# Altium PCB ESP_Grow_Main_Rev_B.PcbDoc (part 1 of 2)
Units mm, origin at the board's own origin, x right, y up, seen from the top; angles counter-clockwise.
Board outline 80 x 80 mm, 4 copper layers (Top Copper, GND, Power, Bottom Copper), stack 1.57 mm thick; 66 components, 30 nets, 190 pads, 293 vias.
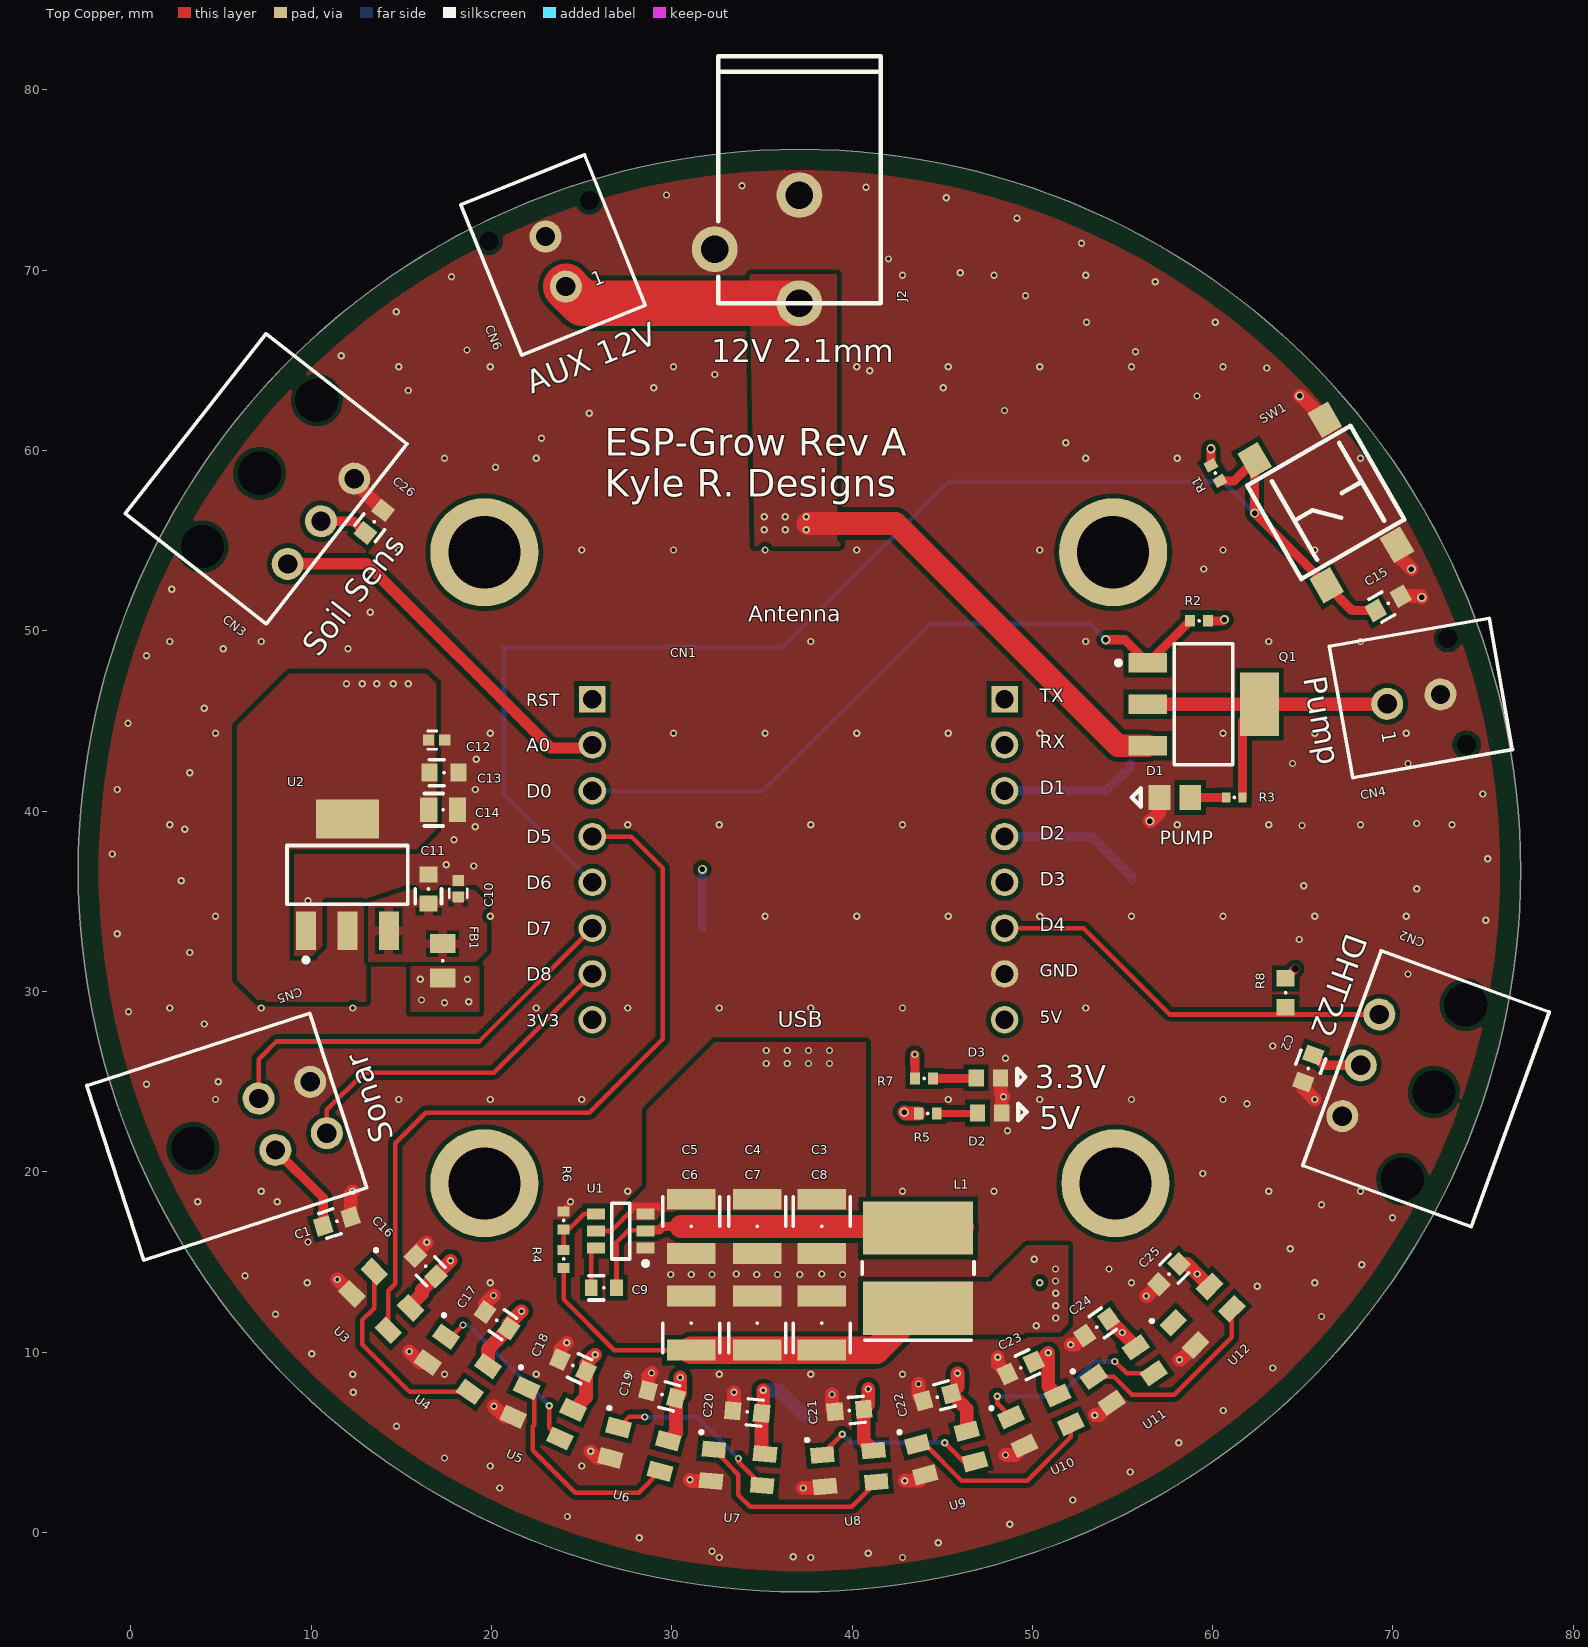
[diagram p0: Top Copper view]
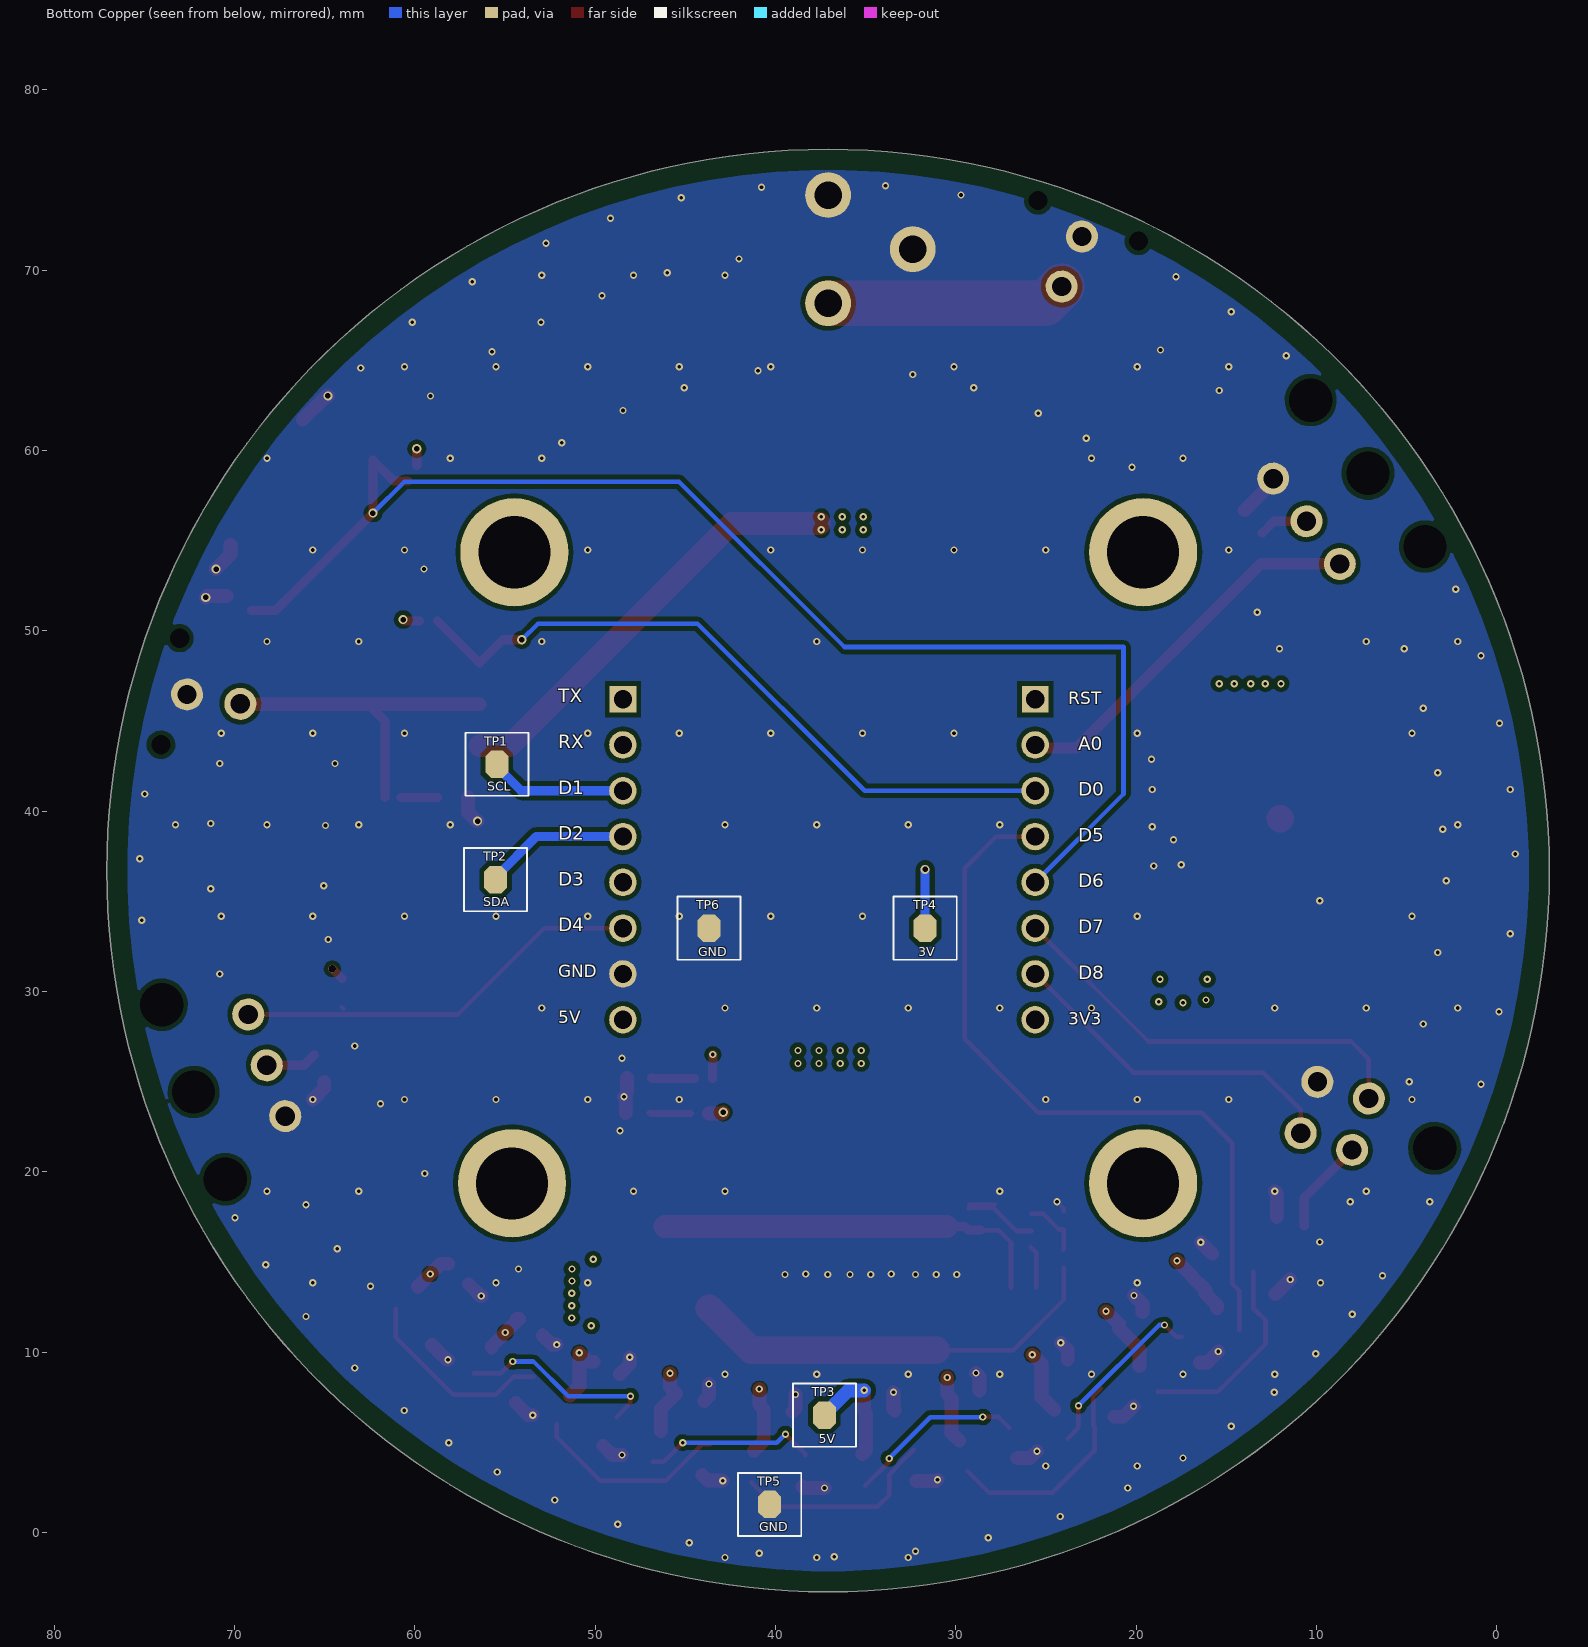
[diagram p1: Bottom Copper view, seen from below]
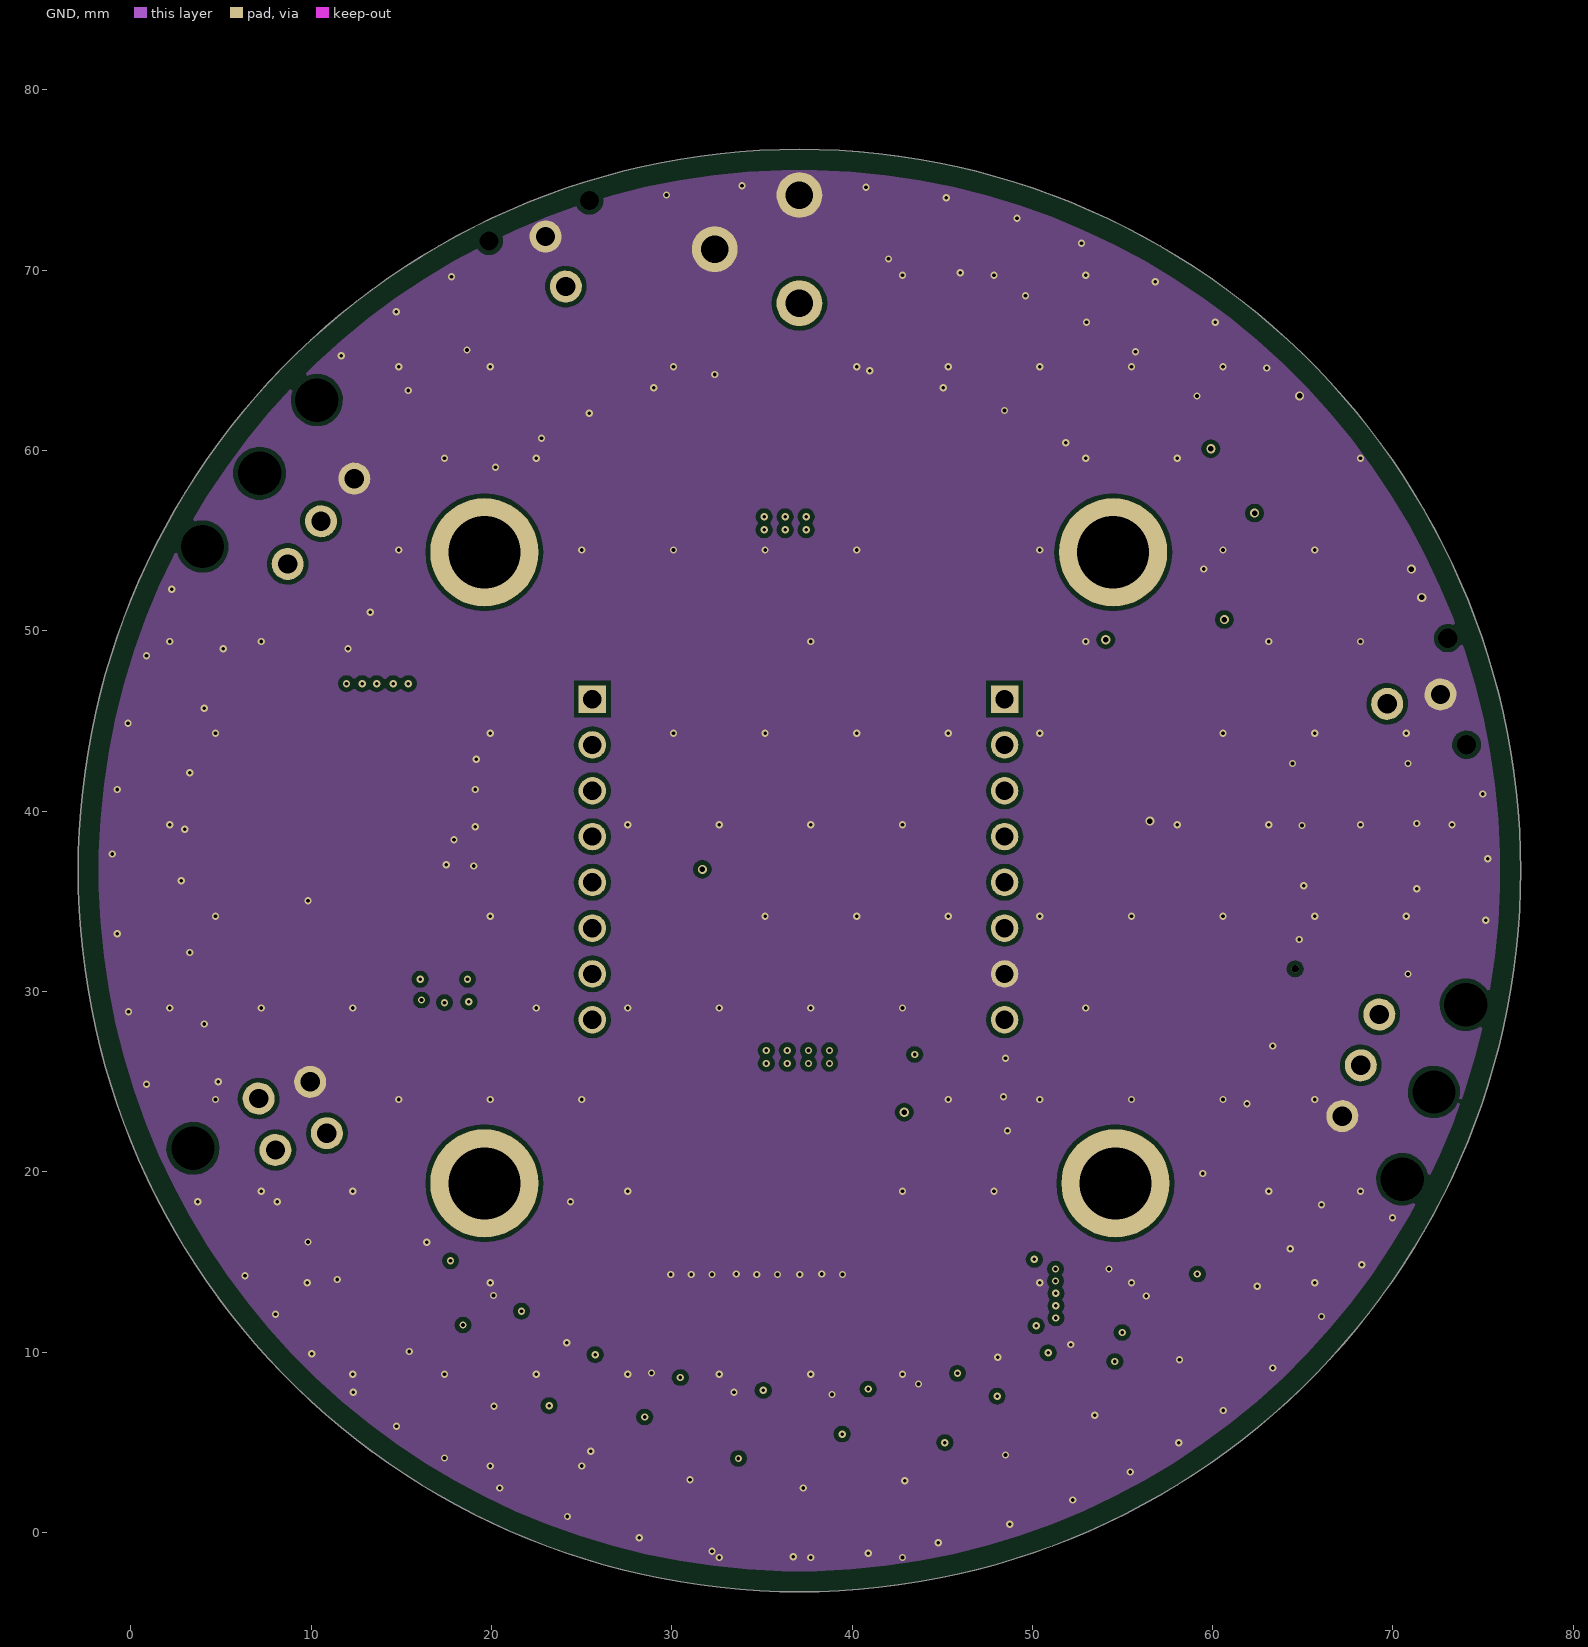
[diagram p2: GND]
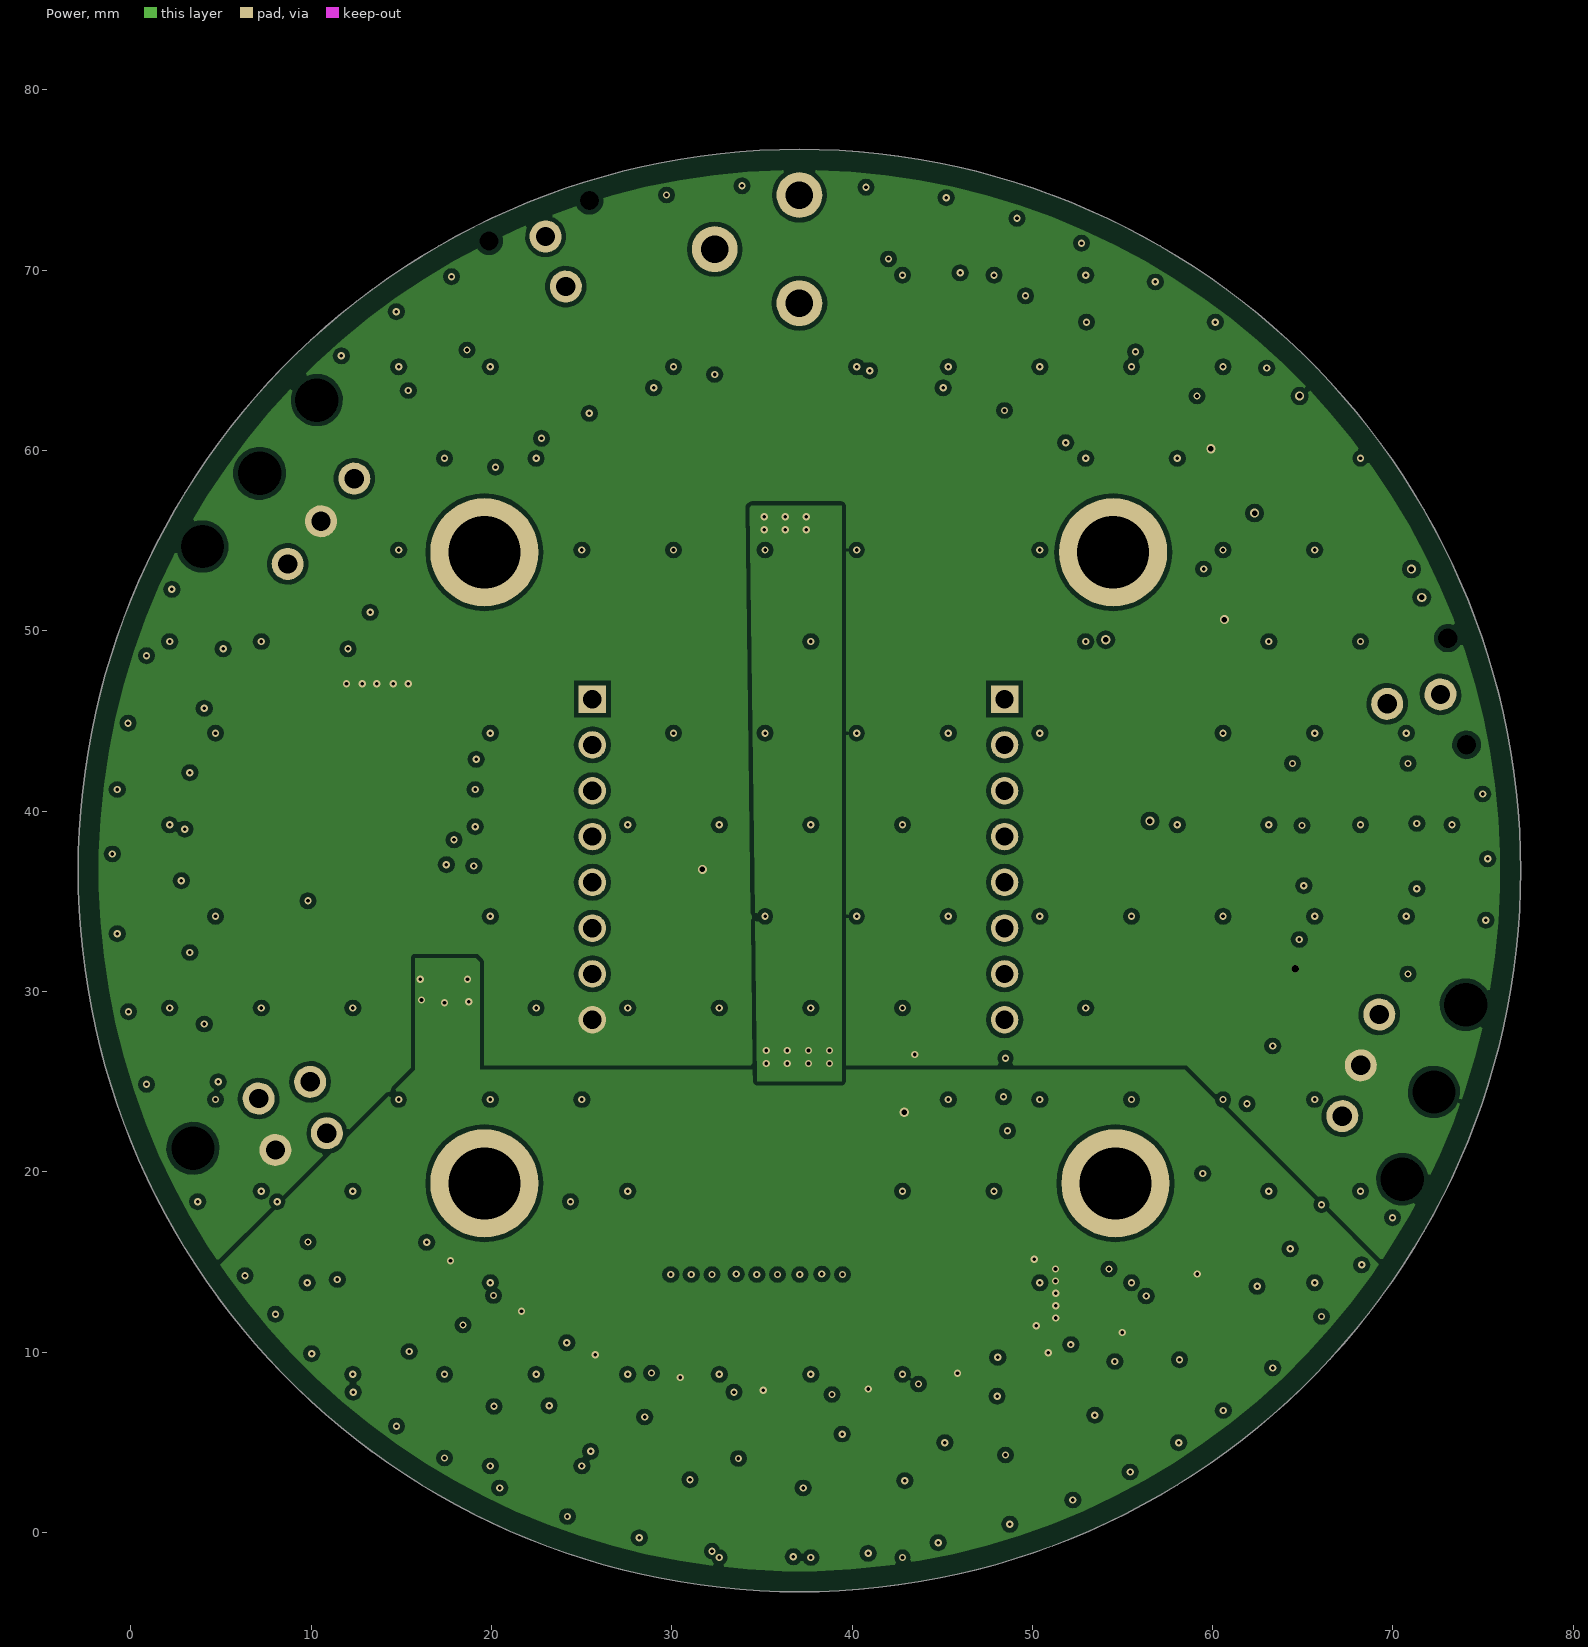
[diagram p3: Power]
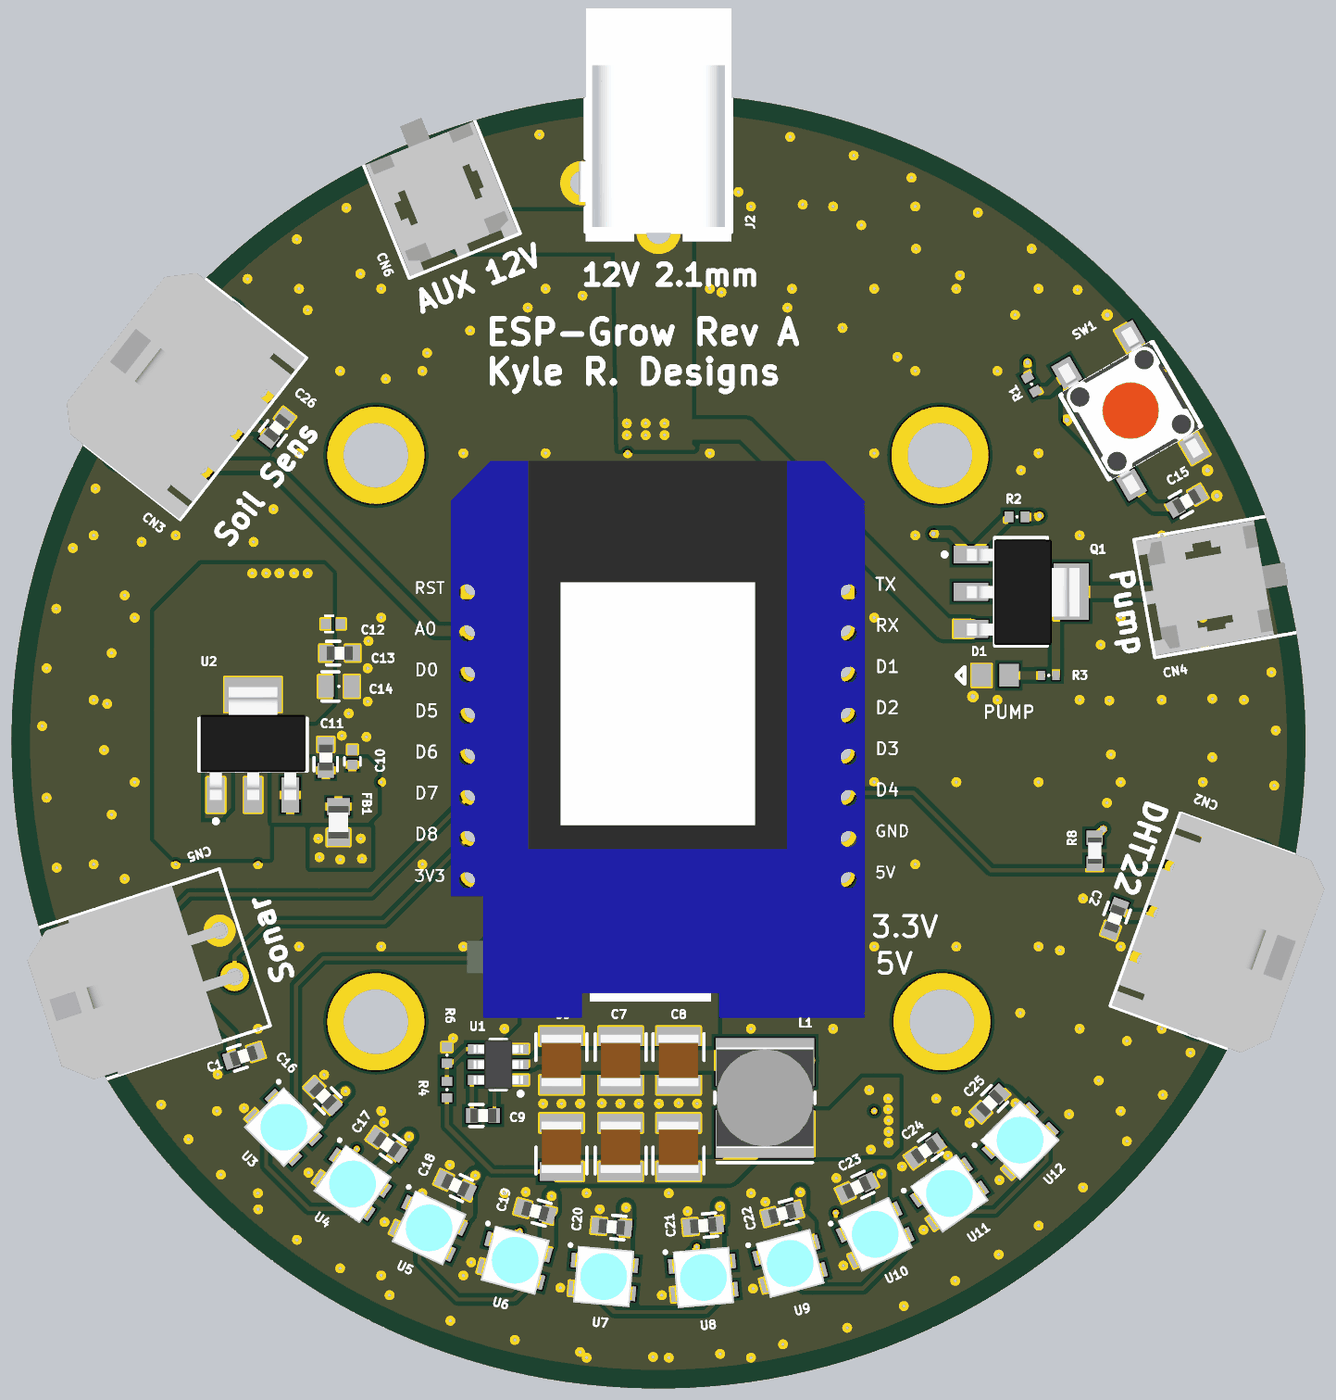
[diagram p4: 3D render of the assembled board from above, using the file's embedded part models]

## Layer stack, top to bottom
Top Mask: solder mask 0.015, Solder Resist, Dk 3.8
Top Copper: signal copper 0.035
Dielectric 1: prepreg 0.1, 2313, Dk 4.05
GND: signal copper 0.0175
Core: core 1.265, FR-4, Dk 4.5
Power: signal copper 0.0175
Dielectric 2: prepreg 0.1, 2313, Dk 4.05
Bottom Copper: signal copper 0.035
Bottom Mask: solder mask 0.015, Solder Resist, Dk 3.8

## Board outline
-2.916,36.703 ccw(c37.084,36.703) 37.084,-3.297 ccw(c37.084,36.703) 77.084,36.703 ccw(c37.084,36.703) 37.084,76.703 ccw(c37.084,36.703)

## Design rules (kind name [scope] priority, off if disabled: settings)
BoardOutlineClearance [All] p1: gap=0.254 ignorepadtopadclearanceinfootprint=FALSE except(0: Arc-SplitContinuation Track-OutlineEdge Track-SplitContinuation SMDPad-SplitContinuation THPad-SplitContinuation Via-SplitContinuation Fill-SplitContinuation Poly-SplitContinuation Region-SplitContinuation Text-SplitContinuation; 1.143: Poly-OutlineEdge)
Clearance [All] p1: gap=0.254 ignorepadtopadclearanceinfootprint=TRUE except(0: Arc-Hole Track-Hole SMDPad-Hole THPad-Hole Via-Hole Fill-Hole Poly-Hole Region-Hole Text-Hole; 0.051: SMDPad-SMDPad)
HoleSize [All] p1: absolutevalues=TRUE maxlimit=6.35 minlimit=0.025 maxpercent=80.000 minpercent=20.000
MinimumSolderMaskSliver [All] p1: minsoldermaskwidth=0
PlaneConnect NetC6_1 [InNet('NetC6_1')] p1: planeconnectstyle=Direct reliefexpansion=0.508 reliefentries=4 reliefconductorwidth=0.254 reliefairgap=0.254
PlaneConnect [All] p2: planeconnectstyle=Direct reliefexpansion=0.508 reliefentries=4 reliefconductorwidth=0.254 reliefairgap=0.254
PolygonConnect PolygonConnect_1 [InNet('5V') Or InNet('3.3V') Or InNet('GND') Or InNet('12V')] p1: connectstyle=Direct reliefconductorwidth=0.254 reliefentries=4 polygonreliefangle="90 Angle" airgapwidth=0.254
PolygonConnect PolygonConnect_2 [InNet('NetC6_1')] p2: connectstyle=Direct reliefconductorwidth=0.254 reliefentries=4 polygonreliefangle="90 Angle" airgapwidth=0.254
PolygonConnect [All] p3: connectstyle=Relief reliefconductorwidth=0.508 reliefentries=4 polygonreliefangle="90 Angle" airgapwidth=0.203
RoutingVias [All] p1: holewidth=0.305 width=0.508 viastyle="Through Hole" minholewidth=0.152 minwidth=0.254 maxholewidth=0.711 maxwidth=1.27
SilkToSilkClearance [All] p1: silktosilkclearance=0.051
SilkToSolderMaskClearance [IsPad] p1: minsilkscreentomaskgap=0.025 clearancetoexposedcopper=TRUE
SolderMaskExpansion [All] p1: expansion=0.102
Width [All] p1: maxlimit=7.62 minlimit=0.152 preferedwidth=0.254
25 further rules are at their usual default settings.

## Components (designator, comment, footprint, x,y, rotation, side; value= is the part's Value field where it differs from the comment)
C1 "1uF" CAPC0603(1608)_N 11.436,17.247 r18 top
C2 "1uF" CAPC0603(1608)_N 65.3,25.725 r250 top
C3 "10uF" CAPC1210(3225)_N 38.323,16.967 r270 top
C4 "10uF" CAPC1210(3225)_N 34.742,16.967 r270 top
C5 "10uF" CAPC1210(3225)_N 31.084,16.967 r270 top
C6 "10uF" CAPC1210(3225)_N 31.084,11.608 r90 top
C7 "10uF" CAPC1210(3225)_N 34.742,11.608 r90 top
C8 "10uF" CAPC1210(3225)_N 38.323,11.608 r90 top
C9 "0.1uF" CAPC0603(1608)_L 26.238,13.564 r0 top
C10 "0.1uF" CAPC0402(1005)_N 18.161,35.694 r90 top
C11 "1uF" CAPC0603(1608)_N 16.51,35.683 r90 top
C12 "0.1uF" CAPC0402(1005)_N 16.967,43.938 r0 top
C13 "1uF" CAPC0603(1608)_N 17.374,42.134 r0 top
C14 "10uF" CAPC0805(2012)_L 17.323,40.077 r0 top
C15 "1uF" CAPC0603(1608)_N 69.741,51.526 r30 top
C16 "1uF" CAPC0603(1608)_N 16.351,14.764 r135 top
C17 "1uF" CAPC0603(1608)_N 20.3,11.762 r145 top
C18 "1uF" CAPC0603(1608)_N 24.523,9.253 r155 top
C19 "1uF" CAPC0603(1608)_N 29.464,7.645 r165 top
C20 "1uF" CAPC0603(1608)_N 34.188,6.68 r175 top
C21 "1uF" CAPC0603(1608)_N 39.853,6.756 r185 top
C22 "1uF" CAPC0603(1608)_N 44.729,7.493 r195 top
C23 "1uF" CAPC0603(1608)_N 49.352,9.119 r205 top
C24 "1uF" CAPC0603(1608)_N 53.569,11.379 r215 top
C25 "1uF" CAPC0603(1608)_N 57.582,14.326 r225 top
C26 "1uF" CAPC0603(1608)_N 13.5,56.05 r52 top
CN1 "J/Wemo_ESP_Shield" WEMOS_D1 24.238,19.606 r0 top locked
CN2 "DHT22" "Molex 1x3 Microfit 90deg" 68.216,25.903 r160 top
CN3 "Soil Sens" "Molex 1x3 Microfit 90deg" 10.55,56.075 r322 top
CN4 "Pump" "Molex 1x2 Microfit 3.0" 69.683,45.95 r280 top
CN5 "Sonar" "Molex 2x2 Microfit 90deg" 4.581,17.819 r18 top
CN6 "AUX 12V" "Molex 1x2 Microfit 3.0" 24.13,69.088 r22 top
D1 "D/LEDR/0805" D/0805 57.905,40.756 r0 top
D2 "D/LEDB/0603" D/0603 47.63,23.263 r180 top
D3 "D/LEDB/0603" D/0603 47.557,25.207 r180 top
FB1 "600 Ohm @ 100MHz" RESC0805(2012)_N 17.297,31.699 r90 top
J2 "12V 2.1mm" CONN_PWR_JACK_2.1x5.5mm 37.084,68.168 r0 top
L1 "4.7uH" INDP6060X45N 43.663,14.656 r90 top
Q1 "DMP6023LE-13" "SOT-223 - DMP6023LE" 59.5,45.925 r270 top
R1 "10K" RESC0402(1005)_N 60.15,58.75 r120 top
R2 "10K" RESC0402(1005)_N 59.25,50.55 r0 top
R3 "1K" RESC0402(1005)_L 61.207,40.756 r0 top
R4 "56.2K 1%" RESC0402(1005)_N 24.003,15.164 r270 top
R5 "470" RESC0402(1005)_N 44.201,23.232 r180 top
R6 "10K" RESC0402(1005)_N 24.003,17.297 r270 top
R7 "100" RESC0402(1005)_N 44.001,25.173 r180 top
R8 "4.7K" RESC0603(1608)_N 64.05,29.925 r90 top
SW1 "SPST-NO 12V" "SW TACT Red 6mm x 6mm" 66.275,57.116 r120 top
TP1 "SCL" Pogo-Testpoint 55.45,42.6 r180 bottom
TP2 "SDA" Pogo-Testpoint 55.525,36.2 r180 bottom
TP3 "5V" Pogo-Testpoint 37.287,6.502 r180 bottom
TP4 "3V" Pogo-Testpoint 31.7,33.51 r180 bottom
TP5 "GND" Pogo-Testpoint 40.325,1.55 r180 bottom
TP6 "GND" Pogo-Testpoint 43.688,33.51 r180 bottom
U1 "U/TPS562209DDCR" SOT-23 27.178,16.713 r180 top
U2 "3.3V" DSO-G3 12.014,36.47 r0 top
U3 "SK6812 MINI" SK6812_MINI 13.504,14.461 r315 top
U4 "SK6812 MINI" SK6812_MINI 17.477,10.855 r325 top
U5 "SK6812 MINI" SK6812_MINI 21.953,7.997 r335 top
U6 "SK6812 MINI" SK6812_MINI 27.051,5.817 r345 top
U7 "SK6812 MINI" SK6812_MINI 32.334,4.588 r355 top
U8 "SK6812 MINI" SK6812_MINI 38.354,4.283 r5 top
U9 "SK6812 MINI" SK6812_MINI 43.612,4.877 r15 top
U10 "SK6812 MINI" SK6812_MINI 48.816,6.387 r25 top
U11 "SK6812 MINI" SK6812_MINI 53.403,8.622 r35 top
U12 "SK6812 MINI" SK6812_MINI 57.818,11.626 r45 top

## Footprints (in the part's own frame and the unit in brackets; to place one, negate y for a bottom-side part, rotate by r counter-clockwise, add the part's x,y. Pads: shape width x height; smd on the part's side, far side on the other; paste and mask are expansions set on the pad)
CAPC0402(1005)_N [mm] "Chip Capacitor, Body 1.0x0.5mm, Height 0.7mm, IPC Medium Density"
  rect 0.62x0.62 smd: 1(-0.45,0) 2(0.45,0)
  silkscreen extent -0.5,-0.5 0,0.5, body extent -0.55,-0.3 0.55,0.3, height 0.7
CAPC0603(1608)_L [mm] "Chip Capacitor, Body 1.6x0.8mm, Height 1.0mm, IPC High Density"
  rect 0.7x0.9 smd: 1(-0.7,0) 2(0.7,0)
  silkscreen extent -0.82,-0.68 0.05,0.68, body extent -0.8,-0.44 0.8,0.43, height 0.86
CAPC0603(1608)_N [mm] "Chip Capacitor, Body 1.6x0.8mm, Height 1.0mm, IPC Medium Density"
  rect 0.9x1 smd: 1(-0.8,0) 2(0.8,0)
  silkscreen extent -0.82,-0.73 0.05,0.73, body extent -0.8,-0.44 0.8,0.43, height 0.86
CAPC0805(2012)_L [mm] "Chip Capacitor, Body 2.0x1.2mm, Height 1.55mm, IPC High Density"
  rect 0.95x1.35 smd: 1(-0.8,0) 2(0.8,0)
  silkscreen extent -1.05,-0.9 0.05,0.9, body extent -1.1,-0.72 1.1,0.72, height 1.55
CAPC1210(3225)_N [mm] "Chip Capacitor, Body 3.2x2.5mm, Height 6.3mm, IPC Medium Density"
  rect 1.15x2.7 smd: 1(-1.5,0) 2(1.5,0)
  silkscreen extent -1.65,-1.58 0.05,1.57, body extent -1.6,-1.25 1.6,1.25, height 2.5
CONN_PWR_JACK_2.1x5.5mm [mm] "Power Connector, 2.1mm ID, 5.5mm OD"
  round 2.54 hole 1.524: 1(0,0) 2(0,6) 3(-4.7,3)
  silkscreen extent -4.5,0 4.5,13.7, body extent -4.9,-0.61 4.5,13.79, height 11
D/0603 [mm] "LED, 2-Leads, Body 1.60x0.80mm, IPC Medium Density"
  rect 0.85x0.95 smd: 1(-0.675,0) 2(0.675,0)
  silkscreen extent -2.05,-0.5 -1.6,0.4, body extent -0.85,-0.45 0.85,0.45, height 0.9
D/0805 [mm] "LED, 2-Leads, Body 2.00x1.25mm, IPC Medium Density"
  rect 1.2x1.4 smd: 1(-0.85,0) 2(0.85,0)
  silkscreen extent -2.4,-0.5 -1.9,0.5, body extent -1.05,-0.67 1.05,0.67, height 1.35
DSO-G3 [mm] "SOT-223/SC-73; 4 Leads; Body 6.7 x 7.3 mm, inc. leads (LxW max)"
  rect 1.1x2.15 smd: 1(-2.3,-3.1) 2(0,-3.1) 3(2.3,-3.1)
  rect 3.5x2.15 smd: 4(0,3.1)
  silkscreen extent -3.35,-4.85 3.35,1.63, body extent -3.25,-3.4 3.25,3.56, height 1.68
INDP6060X45N [mm] "Precision Wire Wound Inductor, 2-Leads, Body 6.00x6.00mm, IPC Medium Density"
  rect 2.95x6.1 smd: 1(-2.225,0) 2(2.225,0)
  silkscreen extent -4,-3.1 0.35,3.1, body extent -3.1,-3 3.1,3, height 4.6
"Molex 1x2 Microfit 3.0" [mil] "Connector; Header; 1x2 Position"
  round 0 hole 42 unplated: 0(-118.11,155.11) 0(118.11,155.11)
  round 70 hole 42: 1(0,0) 2(0,118.11)
  silkscreen extent -146,-102 146,252, body extent -141,-98 141,248, height 390
"Molex 1x3 Microfit 90deg" [mil] "Molex Microfit 1x3 90deg"
  round 0 hole 94.5 unplated: 0(-170.08,202.76) 0(-170.08,-202.76) 0(-170.08,0)
  round 70 hole 42: 1(0,-118.11) 2(0,0) 3(0,118.11)
  silkscreen extent -347,-250 44,249, body extent -349,-251 41,247, height 222
"Molex 2x2 Microfit 90deg" [mil] "Microfit 90 deg 2x2 Position"
  round 0 hole 94.88 unplated: 0(0,144.09)
  round 70 hole 42: 1(170.08,85.04) 2(170.08,203.15) 3(288.19,85.04) 4(288.19,203.15)
  silkscreen extent -178,-55 334,346, body extent -179,-56 303,344, height 348
Pogo-Testpoint [mil] "Test Point - Top Pad Only"
  oct 50x60 smd paste-60: 1(0,0)
  silkscreen extent -69,-69 69,69
RESC0402(1005)_L [mm] "Chip Resistor, Body 1.0x0.5mm, IPC High Density"
  rect 0.45x0.55 smd: 1(-0.45,0) 2(0.45,0)
  silkscreen extent -0.05,-0.05 0.05,0.05, body extent -0.52,-0.27 0.53,0.28, height 0.4
RESC0402(1005)_N [mm] "Chip Resistor, Body 1.0x0.5mm, IPC Medium Density"
  rect 0.55x0.65 smd: 1(-0.5,0) 2(0.5,0)
  silkscreen extent -0.05,-0.05 0.05,0.05, body extent -0.52,-0.27 0.53,0.28, height 0.4
RESC0603(1608)_N [mm] "Chip Resistor, Body 1.6x0.8mm, IPC Medium Density"
  rect 0.9x1 smd: 1(-0.8,0) 2(0.8,0)
  silkscreen extent -0.05,-0.05 0.05,0.05, body extent -0.8,-0.43 0.8,0.43, height 0.51
RESC0805(2012)_N [mm] "Chip Resistor, Body 2.0x1.3mm, IPC Medium Density"
  rect 1.05x1.4 smd: 1(-0.95,0) 2(0.95,0)
  silkscreen extent -0.05,-0.05 0.05,0.05, body extent -1.01,-0.63 0.99,0.63, height 0.46
SK6812_MINI [mm] "RGB LED"
  rect 1.3x0.9 smd: 1(0,0) 2(0,-1.75) 3(2.85,-1.75) 4(2.85,0)
  silkscreen extent -0.82,0.86 -0.72,0.96, body extent -0.41,-2.6 3.29,0.9, height 1
SOT-23 [mm] "SOT23, 6-Leads, Body 2.90x2.80mm, Pitch 0.95mm, IPC Medium Density"
  rect 1x0.6 smd: 1(-1.375,0.95) 2(-1.375,0) 3(-1.375,-0.95) 4(1.375,-0.95) 5(1.375,0) 6(1.375,0.95)
  silkscreen extent -1.5,-1.55 0.5,1.92, body extent -1.53,-1.53 1.53,1.53, height 1.1
"SOT-223 - DMP6023LE" [mm] "SOT-223/SC-73; 4 Leads; Body 6.7 x 7.3 mm, inc. leads (LxW max)"
  rect 1.1x2.15 smd: D(0,-3.1) G(-2.3,-3.1) S(2.3,-3.1)
  rect 3.5x2.15 smd: D(0,3.1)
  silkscreen extent -3.35,-4.85 3.35,1.63, body extent -3.22,-3.35 3.28,3.61, height 1.68
"SW TACT Red 6mm x 6mm" [mm] "Switch, tactile, red button, SMD 6 mm x 6 mm"
  rect 1.6x1.3 smd: 1(-4,2.25) 2(4,2.25) 3(-4,-2.25) 4(4,-2.25)
  silkscreen extent -3,-3.3 3,3.3, body extent -4.5,-3.1 4.5,3.1, height 4.3
WEMOS_D1 [mil] "Wemos D1 footprint"
  rect 58.09x58.09 / inner rect 60x60 / far side rect 58.09x58.09 hole 40: 1(53.62,1047.4) 16(953.62,1047.4)
  round 60 hole 40: 2(53.62,947.4) 3(53.62,847.4) 4(53.62,747.4) 5(53.62,647.4) 6(53.62,547.4) 7(53.62,447.4) 8(53.62,347.4) 9(953.62,347.4) 10(953.62,447.4) 11(953.62,547.4) 12(953.62,647.4) 13(953.62,747.4) 14(953.62,847.4) 15(953.62,947.4)
  body extent 0,0 1008,1354, height 583

## Part data
C1 C2 C11 C13 C15 C16 C17 C18 C19 C20 C21 C22 C23 C24 C25 C26: library part "CAP CER 1UF 25V 10% X7R 0603", "1uF 0603 25V", Manufacturer="TDK Corporation", Manufacturer Part Number=CGA3E1X7R1E105K080AC, Operating Temperature="-55°C ~ 125°C", Package / Case=0603, Ratings=AEC-Q200, Supplier Part Number 1=445-6931-1-ND, Temperature Coefficient=X7R, Tolerance=±10%, Voltage - Rated=25V, Applications=Automotive, Category=Capacitors, ComponentLink1Description=https://product.tdk.com/info/en/catalog/datasheets/mlcc_automotive_general_en.pdf, ComponentLink1URL=https://product.tdk.com/info/en/catalog/datasheets/mlcc_automotive_general_en.pdf, Failure Rate=-, Features=-, Height - Seated (Max)=-, Lead Spacing=-, Lead Style=-, Mounting Type="Surface Mount, MLCC", Packaging="Cut Tape (CT)", Part Status=Active, Pricing 1="1=0.2, 10=0.135, 100=0.0686, 500=0.04696, 1000=0.04154 (USD)", RoHS="RoHS Compliant", Size / Dimension="0.063\" L x 0.032\" W (1.60mm x 0.80mm)", Stock 1=360610, Supplier 1=Digi-Key, Thickness (Max)="0.035\" (0.90mm)"
C3 C4 C5 C6 C7 C8: library part "CAP CER 10UF 25V JB 1210", "10uF 1210 25V", Manufacturer="TDK Corporation", Manufacturer Part Number=C3225JB1E106K250AA, Operating Temperature="-25°C ~ 85°C", Package / Case=1210, Ratings=-, Supplier Part Number 1=445-11850-1-ND, Temperature Coefficient=JB, Tolerance=±10%, Voltage - Rated=25V, Applications="General Purpose", Category=Capacitors, ComponentLink1Description=https://product.tdk.com/info/en/catalog/datasheets/mlcc_commercial_general_en.pdf, ComponentLink1URL=https://product.tdk.com/info/en/catalog/datasheets/mlcc_commercial_general_en.pdf, Failure Rate=-, Features="Low ESL", Height - Seated (Max)=-, Lead Spacing=-, Lead Style=-, Mounting Type="Surface Mount, MLCC", Notification="Current market demand for these product types have resulted in fluctuating and extending lead times. Lead times may differ.", Packaging="Cut Tape (CT)", Part Status=Active, Pricing 1="1=0.74, 10=0.525, 100=0.3454, 500=0.25588 (USD)", RoHS="RoHS Compliant", Size / Dimension="0.126\" L x 0.098\" W (3.20mm x 2.50mm)", Stock 1=19014, Supplier 1=Digi-Key, Thickness (Max)="0.110\" (2.80mm)", Voltage Rated=25V
C9: library part "CAP CER 0.1UF 16V 10% X7R 0603", "0.1uF 0603 16V", Capacitance=0.1µF, Manufacturer=Kemet, Manufacturer Part Number=C0603C104K4RACTU, Operating Temperature="-55°C ~ 125°C", Package / Case=0603, Ratings=-, Supplier Part Number 1=399-1096-2-ND, Temperature Coefficient=X7R, Tolerance=±10%, Voltage - Rated=16V, Applications="General Purpose", Category=Capacitors, ComponentLink1Description=http://www.kemet.com/datasheets&C0603C104K4RACTU, ComponentLink1URL=http://www.kemet.com/datasheets&C0603C104K4RACTU, Features=-, Height - Seated (Max)=-, Lead Spacing=-, Lead Style=-, Mounting Type="Surface Mount, MLCC", Packaging="Tape & Reel (TR)", Pricing 1="4000=0.00414, 8000=0.00378, 12000=0.0036, 28000=0.00342, 100000=0.00248 (USD)", RoHS="RoHS Compliant", Size / Dimension="0.063\" L x 0.031\" W (1.60mm x 0.80mm)", Stock 1=2360000, Supplier 1=Digi-Key, Thickness (Max)="0.034\" (0.87mm)"
C10 C12: library part "CAP CER 0.1UF 25V 10% X5R 0402", "0.1uF 0402 25V", Manufacturer="Taiyo Yuden", Manufacturer Part Number=TMK105BJ104KV-F, Operating Temperature="-55°C ~ 85°C", Package / Case=0402, Ratings=-, Supplier Part Number 1=587-1456-1-ND, Temperature Coefficient=X5R, Tolerance=±10%, Voltage - Rated=25V, Applications="General Purpose", Category=Capacitors, ComponentLink1Description=http://ds.yuden.co.jp/TYCOMPAS/ut/detail.do?productNo=TMK105BJ104KV-F&fileName=TMK105BJ104KV-F_SS&mode=specSheetDownload, ComponentLink1URL=http://ds.yuden.co.jp/TYCOMPAS/ut/detail.do?productNo=TMK105BJ104KV-F&fileName=TMK105BJ104KV-F_SS&mode=specSheetDownload, Features=-, Height - Seated (Max)=-, Lead Spacing=-, Lead Style=-, Mounting Type="Surface Mount, MLCC", Notification="Current market demand for these product types have resulted in fluctuating and extending lead times. Lead times may differ.", Packaging="Cut Tape (CT)", Part Status=Active, Pricing 1="1=0.1, 10=0.043, 100=0.019, 500=0.0136, 1000=0.01069, 2500=0.00972, 5000=0.00894 (USD)", RoHS="RoHS Compliant", Size / Dimension="0.039\" L x 0.020\" W (1.00mm x 0.50mm)", Stock 1=5172635, Supplier 1=Digi-Key, Thickness (Max)="0.022\" (0.55mm)"
C14: library part "CAP CER 10UF 25V X6S 0805", "10UF 25V X6R 0805", Manufacturer="Murata Electronics North America", Manufacturer Part Number=GRM21BC81E106ME51L, Operating Temperature="-55°C ~ 105°C", Package / Case=0805, Ratings=-, Supplier Part Number 1=490-10503-1-ND, Temperature Coefficient=X6S, Tolerance=±20%, Voltage - Rated=25V, Applications="General Purpose", Category=Capacitors, ComponentLink1Description=http://search.murata.co.jp/Ceramy/image/img/A01X/G101/ENG/GRM21BC81E106ME51-01.pdf, ComponentLink1URL=http://search.murata.co.jp/Ceramy/image/img/A01X/G101/ENG/GRM21BC81E106ME51-01.pdf, Features=-, Height - Seated (Max)=-, Lead Spacing=-, Lead Style=-, Mounting Type="Surface Mount, MLCC", Notification="Current market demand for these product types have resulted in fluctuating and extending lead times. Lead times may differ.", Packaging="Cut Tape (CT)", Part Status=Active, Pricing 1="1=0.29, 10=0.199, 100=0.1009, 500=0.06906, 1000=0.0611 (USD)", RoHS="RoHS Compliant", Size / Dimension="0.079\" L x 0.049\" W (2.00mm x 1.25mm)", Stock 1=23735, Supplier 1=Digi-Key, Thickness (Max)="0.055\" (1.40mm)"
CN1: "Wemo Mini Shield for ESP-12", Name="Wemo Mini Shield"
CN2 CN3: library part "MICROFIT 3.0 HDR 90deg 3CKT", "Molex Microfit 1x3 90deg Header", Color=Black, Manufacturer="Molex Inc", Manufacturer Part Number=0436500304, Supplier Part Number 1=WM1876-ND, Category="Connectors, Interconnects", ComponentLink1Description=http://www.molex.com/pdm_docs/sd/436500304_sd.pdf, ComponentLink1URL=http://www.molex.com/pdm_docs/sd/436500304_sd.pdf, Connector Type="Header, Shrouded", Contact Finish=Gold, Contact Finish Thickness="15µin (0.38µm)", Contact Mating Length=-, Contact Type="Male Pin", Fastening Type="Locking Ramp", Features="Board Lock", Mounting Type="Through Hole, Right Angle", Number of Positions=3, Number of Positions Loaded=All, Number of Rows=1, Packaging=Tray, Pitch="0.118\" (3.00mm)", Pricing 1="1=1.39, 10=1.224, 50=1.104, 100=1.056, 250=0.96, 500=0.864, 1000=0.768, 2500=0.696, 5000=0.672 (USD)", RoHS="RoHS Compliant", Row Spacing=-, Stock 1=42564, Supplier 1=Digi-Key, Termination=Solder
CN4 CN6: library part "MICROFIT 3.0 HDR VERT CPI 2CKT", "Molex Microfit 1x2 Vert Header", Color=Black, Manufacturer="Molex, LLC", Manufacturer Part Number=0430450227, Supplier Part Number 1=WM10657-ND, Category="Connectors, Interconnects", ComponentLink1Description=http://www.molex.com/pdm_docs/sd/430450227_sd.pdf, ComponentLink1URL=http://www.molex.com/pdm_docs/sd/430450227_sd.pdf, Connector Type=Header, Contact Finish=Tin, Contact Finish Thickness="60µin (1.52µm)", Contact Mating Length=-, Contact Type="Male Pin", Fastening Type="Locking Ramp", Features="Board Guide", Mounting Type="Through Hole", Number of Positions=2, Number of Positions Loaded=All, Number of Rows=2, Packaging=Tray, Part Status=Active, Pitch=-, Pricing 1="1=0.8, 10=0.705, 50=0.636, 100=0.6083, 250=0.553, 500=0.4977, 1000=0.4424, 2500=0.40092, 5000=0.3871 (USD)", RoHS="RoHS Compliant", Row Spacing="0.118\" (3.00mm)", Shrouding="Shrouded - 4 Wall", Stock 1=4002, Supplier 1=Digi-Key, Termination=Solder
CN5: library part "MICROFIT 3.0 HDR 90deg 4CKT", "Molex Microfit 2x2 90deg Header", Color=Black, Manufacturer="Molex Inc", Manufacturer Part Number=0430450400, Supplier Part Number 1=WM1814-ND, Category="Connectors, Interconnects", ComponentLink1Description=http://www.molex.com/pdm_docs/sd/430450400_sd.pdf, ComponentLink1URL=http://www.molex.com/pdm_docs/sd/430450400_sd.pdf, Connector Type="Header, Shrouded", Contact Finish=Tin, Contact Finish Thickness="100µin (2.54µm)", Contact Mating Length=-, Contact Type="Male Pin", Fastening Type="Locking Ramp", Features="Board Lock", Mounting Type="Through Hole, Right Angle", Number of Positions=4, Number of Positions Loaded=All, Number of Rows=2, Packaging=Tray, Pitch="0.118\" (3.00mm)", Pricing 1="1=1.35, 10=1.228, 50=1.1026, 100=1.0525, 250=0.95228, 500=0.8771, 1000=0.7518, 2500=0.70168, 5000=0.6666 (USD)", RoHS="RoHS Compliant", Row Spacing="0.118\" (3.00mm)", Stock 1=9668, Supplier 1=Digi-Key, Termination=Solder
D1: "Red 625nm LED Indication - Discrete 2V 0805", Current - Test=20mA, Package / Case=0805, Supplier Part Number 1=732-4984-6-ND, Voltage - Forward (Vf) (Typ)=2V, Cost=0.23, Digikey Part=732-4984-1-ND, Supplier 1=Digi-Key
D2 D3: Current - Test=5mA, Package / Case=0603, Supplier Part Number 1=1080-1562-6-ND, Voltage - Forward (Vf) (Typ)=2.8V, Datasheet=https://everlightamericas.com/index.php?controller=attachment&id_attachment=3217, Supplier 1=Digi-Key
FB1: library part "FERRITE 600 OHM 2.0A 0805", "600 OHM 0805 2.0A", Current Rating=2A, DC Resistance (DCR)="150 mOhm Max", Manufacturer="Wurth Electronics Inc", Manufacturer Part Number=742792040, Package / Case="0805 (2012 Metric)", Supplier Part Number 1=732-1620-1-ND, Category=Filters, ComponentLink1Description=http://katalog.we-online.de/pbs/datasheet/742792040.pdf, ComponentLink1URL=http://katalog.we-online.de/pbs/datasheet/742792040.pdf, Creator=osman, Filter Type="Differential Mode - Single", Height (Max)="0.043\" (1.10mm)", Impedance @ Frequency="600 Ohm @ 100MHz", Mounting Type="Surface Mount", Packaging="Cut Tape (CT)", Pricing 1="1=0.24, 50=0.2344, 100=0.2156, 500=0.20624, 1000=0.19687, 2000=0.1875 (USD)", RoHS="RoHS Compliant", Size / Dimension="0.079\" L x 0.047\" W (2.00mm x 1.20mm)", Stock 1=34670, Supplier 1=Digi-Key
J2: library part "CONN PWR JACK 2.1", "2.1 mm barrel jack", Color=Black, Current Rating=2.5A, Manufacturer="CUI Inc", Manufacturer Part Number=PJ-002A, Operating Temperature="-25°C ~ 85°C", Supplier Part Number 1=CP-002AH-ND, Voltage - Rated=16VDC, Category="Connectors, Interconnects", ComponentLink1Description="Manufacturer Link", ComponentLink1URL=http://domino.kycon.com/internet/Products.html, ComponentLink2Description=http://www.cui.com/product/resource/digikeypdf/pj-002a.pdf, ComponentLink2URL=http://www.cui.com/product/resource/digikeypdf/pj-002a.pdf, ComponentLink3Description=http://www.cui.com/product/resource/digikeypdf/pj-002ah.pdf, ComponentLink3URL=http://www.cui.com/product/resource/digikeypdf/pj-002ah.pdf, Connector Type=Jack, Contact Material="Copper Alloy", Contact Material - Plating=Tin, DatasheetDocument=09-May-2002, Features=-, Gender=Male, Housing Color=Black, Housing Material=Thermoplastic, Internal Switch(s)="Single Switch, Normally Closed", Mounting Type="Through Hole, Right Angle", Number of Positions/Contacts="2 Conductors, 3 Contacts", Plug/Mating Plug Diameter="2.1mm ID, 5.5mm OD", Pricing 1="1=1.01, 10=0.704, 100=0.4724, 500=0.3819, 1000=0.3417, 2500=0.27135 (USD)", Published=17-Dec-2003, Publisher="Altium Limited", RoHS="RoHS Compliant", Shielding=Unshielded, Stock 1=47553, Supplier 1=Digi-Key, Termination="Solder Eyelet(s)"
L1: library part L/4.7uH/3A, "FIXED IND 4.7UH 3A 37.6 MOHM SMD", Current Rating (Amps)=3A, Current Saturation (Amps)=4A, DC Resistance (DCR)="37.6mOhm Max", Manufacturer Part Number=SRN6045-4R7Y, Datasheet=https://www.bourns.com/data/global/pdfs/SRN6045.pdf, Inductance=4.7uH, Shielding=Semi-Shielded, Size / Dimension="0.236\" L x 0.236\" W (6.00mm x 6.00mm)"
Q1: "MOSFET P-CH 60V 7A SOT223", Current - Continuous Drain (Id) @ 25°C="7A (Ta), 18.2A (Tc)", Drain to Source Voltage (Vdss)=60V, Drive Voltage (Max Rds On,  Min Rds On)="4.5V, 10V", Manufacturer="Diodes Incorporated", Operating Temperature="-55°C ~ 150°C (TJ)", Package / Case="TO-261-4, TO-261AA", Power Dissipation (Max)="2W (Ta)", Supplier Device Package=SOT-223, Supplier Part Number 1=DMP6023LE-13DICT-ND, Category="Discrete Semiconductor Products", ComponentLink1Description=https://www.diodes.com/assets/Datasheets/DMP6023LE.pdf, ComponentLink1URL=https://www.diodes.com/assets/Datasheets/DMP6023LE.pdf, FET Feature=-, FET Type=P-Channel, Manufacturer Part Number=DMP6023LE-13, Mounting Type="Surface Mount", Packaging="Cut Tape (CT)", Part Status=Active, Pricing 1="1=0.95, 10=0.829, 100=0.6396, 500=0.4738, 1000=0.37904 (USD)", Rds On (Max) @ Id, Vgs="28 mOhm @ 5A, 10V", RoHS="RoHS Compliant", Stock 1=16540, Supplier 1=Digi-Key, Technology="MOSFET (Metal Oxide)", Vgs (Max)=±20V, Vgs(th) (Max) @ Id="3V @ 250µA"
R1 R2 R6: library part "RES 10K OHM 1% 1/16W 0402", "10K 0402", Manufacturer="Samsung Electro-Mechanics", Manufacturer Part Number=RC1005F103CS, Operating Temperature="-55°C ~ 155°C", Package / Case="0402 (1005 Metric)", Power (Watts)="0.063W, 1/16W", Supplier Device Package=0402, Supplier Part Number 1=1276-3431-1-ND, Temperature Coefficient=±100ppm/°C, Tolerance=±1%, Category=Resistors, ComponentLink1Description=http://www.samsungsem.com/kr/support/product-search/chip-resistor/RC1005F103CS.jsp, ComponentLink1URL=http://www.samsungsem.com/kr/support/product-search/chip-resistor/RC1005F103CS.jsp, Composition="Thick Film", Failure Rate=-, Features="Moisture Resistant", Height - Seated (Max)="0.016\" (0.40mm)", Packaging="Cut Tape (CT)", Part Status=Active, Pricing 1="1=0.1, 10=0.021, 100=0.0086, 1000=0.00385, 2500=0.00334, 5000=0.00276 (USD)", RoHS="RoHS Compliant", Size / Dimension="0.039\" L x 0.020\" W (1.00mm x 0.50mm)", Stock 1=25834562, Supplier 1=Digi-Key
R3: library part "RES 1K OHM 1% 1/16W 0402", "1K 0402", Case/Package=0402, Case Code (Metric)=1005, Manufacturer=Yageo, Manufacturer Part Number=RC0402FR-071KL, Max Operating Temperature=155°C, Min Operating Temperature=-55°C, Power Rating=62.5mW, Supplier Part Number 1=311-1.00KLRCT-ND, Temperature Coefficient=100ppm/°C, Tolerance=1%, Voltage Rating=50V, Case Code (Imperial)=0402, Category=Resistors, ComponentLink1Description=https://datasheet.ciiva.com/2453/pyu-r-int-thick-7-2453361.pdf, ComponentLink1URL=https://datasheet.ciiva.com/2453/pyu-r-int-thick-7-2453361.pdf, ComponentLink2Description=https://datasheet.ciiva.com/2453/pyu-r-int-thick-7-2453362.pdf, ComponentLink2URL=https://datasheet.ciiva.com/2453/pyu-r-int-thick-7-2453362.pdf, ComponentLink3Description=https://datasheet.ciiva.com/2453/pyu-r-int-thick-7-2453363.pdf, ComponentLink3URL=https://datasheet.ciiva.com/2453/pyu-r-int-thick-7-2453363.pdf, ComponentLink4Description=https://datasheet.ciiva.com/22747/1018594-22747509.pdf, ComponentLink4URL=https://datasheet.ciiva.com/22747/1018594-22747509.pdf, ComponentLink5Description=https://datasheet.ciiva.com/15189/getdatasheetpartid-323696-15189334.pdf, ComponentLink5URL=https://datasheet.ciiva.com/15189/getdatasheetpartid-323696-15189334.pdf, ComponentLink6Description=https://datasheet.ciiva.com/16740/pyu-rc0402-51-rohs-l-6-r-16740567.pdf, ComponentLink6URL=https://datasheet.ciiva.com/16740/pyu-rc0402-51-rohs-l-6-r-16740567.pdf, ComponentLink7Description=https://datasheet.ciiva.com/12667/pyu-rc0402-51-rohs-l-6-r-12667930.pdf, ComponentLink7URL=https://datasheet.ciiva.com/12667/pyu-rc0402-51-rohs-l-6-r-12667930.pdf, ComponentLink8Description=https://datasheet.ciiva.com/11819/0900766b80c66297-11819452.pdf, ComponentLink8URL=https://datasheet.ciiva.com/11819/0900766b80c66297-11819452.pdf, ComponentLink9Description=https://datasheet.ciiva.com/11819/0900766b80c66297-11819477.pdf, ComponentLink9URL=https://datasheet.ciiva.com/11819/0900766b80c66297-11819477.pdf, ComponentLink10Description=https://datasheet.ciiva.com/12666/pyu-rc0402-51-rohs-l-6-r-12666741.pdf, ComponentLink10URL=https://datasheet.ciiva.com/12666/pyu-rc0402-51-rohs-l-6-r-12666741.pdf, ComponentLink11Description=https://datasheet.ciiva.com/17063/pyu-rc0402-51-rohs-l-6-r-17063193.pdf, ComponentLink11URL=https://datasheet.ciiva.com/17063/pyu-rc0402-51-rohs-l-6-r-17063193.pdf, ComponentLink12Description=https://datasheet.ciiva.com/22747/1018594-22747513.pdf, ComponentLink12URL=https://datasheet.ciiva.com/22747/1018594-22747513.pdf, ComponentLink13Description=https://datasheet.ciiva.com/7849/1018594-7849869.pdf, ComponentLink13URL=https://datasheet.ciiva.com/7849/1018594-7849869.pdf, ComponentLink14Description=https://datasheet.ciiva.com/7983/1018594-7983502.pdf, ComponentLink14URL=https://datasheet.ciiva.com/7983/1018594-7983502.pdf, ComponentLink15Description=https://datasheet.ciiva.com/7849/1018594-7849871.pdf, ComponentLink15URL=https://datasheet.ciiva.com/7849/1018594-7849871.pdf, Composition="Thick Film", Depth=0.5mm, Height=0.32mm, Lead Free="Lead Free", Length=1mm, Military Standard=Not, Number of Pins=2, Package / Case=0402, Packaging="Tape and Reel", Pricing 1="1=0.1, 10=0.014, 100=0.0056, 1000=0.0025, 2500=0.0022, 5000=0.0018 (USD)", REACH SVHC=Unknown, Resistance=1K, Stock 1=21888659, Supplier 1=Digi-Key, Termination=SMD/SMT, Voltage Rating (DC)=50V, Width=0.5mm
R4: library part "RES 56.2K OHM 1% 1/10W 0402", "56.2K 1% 0402", Manufacturer="Panasonic Electronic Components", Manufacturer Part Number=ERJ-2RKF5622X, Operating Temperature="-55°C ~ 155°C", Package / Case=0402, Power (Watts)="0.1W, 1/10W", Resistance (Ohms)=56.2k, Supplier Part Number 1=P56.2KLCT-ND, Temperature Coefficient=±100ppm/°C, Tolerance=±1%, Category=Resistors, ComponentLink1Description=http://industrial.panasonic.com/www-cgi/jvcr13pz.cgi?E+PZ+3+AOA0002+ERJ2RKF5622X+7+WW, ComponentLink1URL=http://industrial.panasonic.com/www-cgi/jvcr13pz.cgi?E+PZ+3+AOA0002+ERJ2RKF5622X+7+WW, Composition="Thick Film", Failure Rate=-, Features="Automotive AEC-Q200", Height="0.016\" (0.40mm)", Number of Terminations=2, Packaging="Cut Tape (CT)", Part Status=Active, Pricing 1="1=0.1, 50=0.0124, 100=0.0091, 250=0.00692, 500=0.00554, 1000=0.00408, 5000=0.00293 (USD)", RoHS="RoHS Compliant", Size / Dimension="0.039\" L x 0.020\" W (1.00mm x 0.50mm)", Stock 1=222789, Supplier 1=Digi-Key, Supplier Device Package=0402
R5: library part "RES 470 OHM 1% 1/10W 0402", "470 0402", Manufacturer="Panasonic Electronic Components", Manufacturer Part Number=ERJ-2RKF4700X, Operating Temperature="-55°C ~ 155°C", Package / Case=0402, Power (Watts)="0.1W, 1/10W", Supplier Part Number 1=P470LCT-ND, Temperature Coefficient=±100ppm/°C, Tolerance=±1%, Category=Resistors, ComponentLink1Description=https://industrial.panasonic.com/cdbs/www-data/pdf/RDA0000/AOA0000C283.pdf, ComponentLink1URL=https://industrial.panasonic.com/cdbs/www-data/pdf/RDA0000/AOA0000C283.pdf, Composition="Thick Film", Failure Rate=-, Features="Automotive AEC-Q200", Height - Seated (Max)="0.016\" (0.40mm)", Number of Terminations=2, Packaging="Cut Tape (CT)", Part Status=Active, Pricing 1="1=0.1, 10=0.025, 25=0.018, 50=0.0136, 100=0.01, 250=0.00764, 500=0.00612, 1000=0.00451, 5000=0.00323 (USD)", Resistance (Ohms)=470, RoHS="RoHS Compliant", Size / Dimension="0.039\" L x 0.020\" W (1.00mm x 0.50mm)", Stock 1=342632, Supplier 1=Digi-Key, Supplier Device Package=0402
R7: library part "RES 100 OHM 1% 1/16W 0402", "100 0402", Manufacturer=Yageo, Manufacturer Part Number=RC0402FR-07100RL, Operating Temperature="-55°C ~ 155°C", Package / Case="0402 (1005 Metric)", Power (Watts)="0.063W, 1/16W", Supplier Device Package=0402, Supplier Part Number 1=311-100LRCT-ND, Temperature Coefficient=±100ppm/°C, Tolerance=±1%, Category=Resistors, ComponentLink1Description=http://www.yageo.com/documents/recent/PYu-RC_Group_51_RoHS_L_8.pdf, ComponentLink1URL=http://www.yageo.com/documents/recent/PYu-RC_Group_51_RoHS_L_8.pdf, Composition="Thick Film", Failure Rate=-, Features="Moisture Resistant", Height - Seated (Max)="0.016\" (0.40mm)", Packaging="Cut Tape (CT)", Part Status=Active, Pricing 1="1=0.1, 10=0.014, 100=0.0056, 1000=0.00253, 2500=0.0022, 5000=0.00181 (USD)", RoHS="RoHS Compliant", Size / Dimension="0.039\" L x 0.020\" W (1.00mm x 0.50mm)", Stock 1=14557677, Supplier 1=Digi-Key
R8: library part "RES 4.7K OHM 1/10W 5% 0603 SMD", "4.7K 0603", Manufacturer="Panasonic Electronic Components", Manufacturer Part Number=ERJ-3GEYJ472V, Package / Case=0603, Power (Watts)="0.1W, 1/10W", Resistance (Ohms)=4.7k, Supplier Part Number 1=P4.7KGCT-ND, Temperature Coefficient=±200ppm/°C, Tolerance=±5%, Category=Resistors, ComponentLink1Description=http://industrial.panasonic.com/www-cgi/jvcr13pz.cgi?E+PZ+3+AOA0001+ERJ3GEYJ472V+7+WW, ComponentLink1URL=http://industrial.panasonic.com/www-cgi/jvcr13pz.cgi?E+PZ+3+AOA0001+ERJ3GEYJ472V+7+WW, Composition="Thick Film", Features="Automotive AEC-Q200 Qualified", Height="0.022\" (0.55mm)", Number of Terminations=2, Packaging="Cut Tape (CT)", Pricing 1="1=0.1, 50=0.0126, 100=0.0096, 250=0.00716, 500=0.00528, 1000=0.00352, 2500=0.00297 (USD)", RoHS="RoHS Compliant", Size / Dimension="0.063\" L x 0.031\" W (1.60mm x 0.80mm)", Stock 1=1261582, Supplier 1=Digi-Key, Supplier Device Package=0603
SW1: library part "PTS645SM43SMTR92 LFS", "SWITCH TACTILE SPST-NO 0.05A 12V", Contact Rating @ Voltage="0.05A @ 12VDC", Illumination Type, Color=-, Manufacturer=C&K, Operating Force=160gf, Operating Temperature="-20°C ~ 60°C", Supplier Part Number 1=CKN9112CT-ND, Actuator Height off PCB, Vertical=4.30mm, Actuator Length, Right Angle=-, Actuator Material="Polyamide (PA66), Nylon 6/6", Actuator Orientation="Top Actuated", Actuator Type=Standard, Category=Switches, Circuit=SPST-NO, ComponentLink1Description=http://www.ckswitches.com/media/1471/pts645.pdf, ComponentLink1URL=http://www.ckswitches.com/media/1471/pts645.pdf, Features="Blue Actuator", Illumination=Non-Illuminated, Illumination Voltage (Nominal)=-, Ingress Protection=-, Manufacturer Part Number="PTS645SM43SMTR92 LFS", Mechanical Life="100,000 Cycles", Mounting Type="Surface Mount", Outline="6.00mm x 6.00mm", Packaging="Cut Tape (CT)", Part Status=Active, Pricing 1="1=0.15, 10=0.147, 25=0.1416, 50=0.1366, 100=0.129, 250=0.12144, 500=0.11638 (USD)", RoHS="RoHS Compliant", Stock 1=234699, Supplier 1=Digi-Key, Switch Function=Off-Mom, Switch Travel=-, Termination Style="Gull Wing"
TP1 TP2 TP3 TP4 TP5 TP6: library part CMP-001-0557-03, "Test Point- Current one", Component Name=TestPoint, Pin Count=1
U1: "IC REG BUCK ADJ 2A TSOT23-6", Current - Output=2A, Frequency - Switching=650KHZ, Manufacturer Part Number=TPS562209DDCR, Supplier Device Package=TSOT-23-6, Voltage - Input (Max)=17V, Voltage - Input (Min)=4.5V, Voltage - Output (Max)=7V, Voltage - Output (Min/Fixed)=0.765V, Topology=Buck
U2: library part LD1117S33, "3.3 volt fixed regulator, 800mA", Supplier Part Number 1=497-1242-1-ND, Supplier 1=Digi-Key
U3 U4 U5 U6 U7 U8 U9 U10 U11 U12: library part U/SK6812MINI, "Serial RGB LED SMT5050"

## Free pads (board coordinates)
  round 6 hole 4: 0(19.61,19.356) 0(19.61,54.356) 0(54.483,54.356) 0(54.61,19.356)

## Via types
v1: diameter 0.406, hole 0.203, Top Copper to Bottom Copper, 282 vias
v2: diameter 0.508, hole 0.305, Top Copper to Bottom Copper, 10 vias
v3: diameter 0.406, hole 0.406, Top Copper to Bottom Copper, 1 vias

## Nets (pads, with @x,y where several pads share a name; then routed paths per layer and width w, separated by ;. In a path a pad name is that pad's centre, name@x,y a point inside that pad or via, vN(x,y) a via of type N, cw(c..) or ccw(c..) an arc to the next point about the centre after c; other vN are vias at no path point)
3.3V: C1.1 C2.1 C12.1 C13.1 C14.1 C26.1 CN1.8 CN2.2 CN3.2 CN5.1 R1.2 R2.2 R7.2 R8.2 TP4.1 U2.2 U2.4 | length 18.1
  Top Copper w0.508: CN5.1 10.675,18.555 C1.1 ; CN3.2 12.352,56.075 C26.1 ; v1(43.475,26.5) 43.475,25.973 43.501,25.947 R7.2 ; R2.2 60.575,50.55 v2(60.65,50.625) ; R1.2 v2(59.9,60.1) ; R8.2 v3(64.575,31.25) ; C2.1 66.148,25.903 CN2.2
  Bottom Copper w0.508: TP4.1 v2(31.7,36.772)
  other v1: 11.963,47.066 12.831,47.066 13.64,47.066 14.554,47.066 15.392,47.066
5V: C6.1 C7.1 C8.1 C16.1 C17.1 C18.1 C19.1 C20.1 C21.1 C22.1 C23.1 C24.1 C25.1 FB1.1 L1.1 R4.2 R5.2 TP3.1 U3.4 U4.4 U5.4 U6.4 U7.4 U8.4 U9.4 U10.4 U11.4 U12.4 | length 61.1
  Top Copper w0.254: R4.2 24.003,12.916 26.811,10.108 C6.1
  Top Copper w0.762: U3.4 15.519,12.598 16.154,13.233 16.154,13.437 C16.1 16.916,14.249 v1(17.729,15.062) ; U4.4 19.812,10.16 C17.1 20.955,11.557 v1(21.666,12.268) ; U5.4 25.248,7.504 C18.1 25.248,9.347 v1(25.756,9.855) ; U6.4 30.237,5.512 C19.1 30.48,7.682 v1(30.48,8.585) ; v1(35.077,7.874) 35.077,6.703 C20.1 34.985,4.528 U7.4 ; v1(40.894,7.95) 40.894,7.071 C21.1 40.65,5.075 U8.4 ; v2(42.9,23.3) 42.968,23.232 R5.2 ; v1(45.847,8.823) 45.847,8.045 C22.1 46.365,6.838 U9.4 ; C23.1 50.376,9.457 v1(50.876,9.957) 50.876,8.114 U10.4 ; C24.1@54.332,11.838 C24.1 55.738,10.324 U11.4 ; C25.1 58.583,14.891 v1(59.15,14.324) U12.4
  Top Copper w1.524: C6.1 C7.1 C8.1 41.34,10.108 L1.1
  Bottom Copper w0.762: v1(35.077,7.874) 35.963,7.874 37.287,6.55 TP3.1
  other v1: 54.981,11.081 50.216,11.455 51.308,11.887 51.308,12.568 51.308,13.259 51.283,13.945 51.283,14.605 50.114,15.138 17.4,29.375 18.75,29.425 16.125,29.525 16.05,30.675 18.675,30.675
12V: C3.1 C4.1 C5.1 CN6.1 J2.1 Q1.S U1.3 U1.5 | length 42.9
  Top Copper w0.254: U1.5 26.645,16.713 27.933,18.002 29.242,18.002 29.256,17.988 ; 27.85,18.166 29.256,18.166 29.256,17.988 ; 29.286,17.958 29.256,17.988
  Top Copper w1.27: 37.55,55.95 42.425,55.95 54.75,43.625 Q1.S
  Top Copper w2.54: CN6.1 25.05,68.168 J2.1
  other v1: 35.25,26 36.417,26 37.583,26 38.75,26 35.25,26.725 36.417,26.725 37.583,26.725 38.75,26.725 35.125,55.6 36.292,55.6 37.458,55.6 35.125,56.325 36.292,56.325 37.458,56.325
BTN_SEL: C15.1 CN1.5 R1.1 SW1.1 SW1.2 | length 75.5
  Top Copper w0.508: R1.1 61.189,58.317 SW1.2 v2(62.327,56.527) SW1.1 67.728,51.126 C15.1
  Bottom Copper w0.254: CN1.5 20.7,40.95 20.7,49.1 36.175,49.1 45.35,58.275 60.579,58.275 v2(62.327,56.527)
Data: U7.1 U8.3 | length 11.6
  Top Copper w0.254: U7.1 32.337,4.588 33.192,3.733 33.192,3.707 33.7,3.199 33.7,2.075 34.35,1.425 39.982,1.425 U8.3
DHT22: CN1.11 CN2.1 R8.1 | length 22.9
  Top Copper w0.254: CN1.11 52.84,33.51 57.628,28.722 CN2.1 ; R8.1@63.975,29.05 R8.1
ECHO: CN1.7 CN5.3 | length 19.5
  Top Copper w0.254: CN5.3 10.875,23.432 12.943,25.5 20.13,25.5 CN1.7
  Top Copper w0.508: CN1.7@25.6,30.6 CN1.7
GND: C1.2 C2.2 C3.2 C4.2 C5.2 C6.2 C7.2 C8.2 C10.2 C11.2 C12.2 C13.2 C14.2 C15.2 C16.2 C17.2 C18.2 C19.2 C20.2 C21.2 C22.2 C23.2 C24.2 C25.2 C26.2 CN1.10 CN2.3 CN3.3 CN4.2 CN5.4 CN6.2 D1.1 D2.1 D3.1 J2.2 J2.3 R6.1 SW1.3 SW1.4 TP5.1 TP6.1 U1.1 U2.1 U3.2 U4.2 U5.2 U6.2 U7.2 U8.2 U9.2 U10.2 U11.2 U12.2 | length 36.9
  Top Copper w0.254: v1(11.455,14.021) v1@11.47,14.021 ; R6.1 24.003,17.958 v1(24.384,18.339)
  Top Copper w0.508: C16.2 C16.2@15.785,15.458
  Top Copper w0.762: v1@11.47,14.021 U3.2 ; C1.2 12.197,18.801 v1(12.319,18.923) ; CN3.3 12.397,58.276 C26.2 ; v1(15.443,10.033) 16.055,9.421 U4.2 ; C16.2@15.785,15.458 v1(16.408,16.081) ; C17.2 19.644,12.659 v1(20.117,13.132) ; v1(20.142,6.985) 20.716,6.411 U5.2 ; C18.2 23.798,10.132 v1(24.181,10.516) ; v1(25.502,4.496) 25.871,4.126 U6.2 ; C19.2 28.691,8.651 v1(28.88,8.839) ; v1(31.013,2.921) 31.09,2.845 U7.2 ; C20.2 33.452,6.81 v1(33.452,7.772) ; v1(37.287,2.464) 38.43,2.464 U8.2 ; v1(38.887,7.645) 38.887,6.855 C21.2 ; v1(42.926,2.87) 43.749,2.87 U9.2 ; v1(43.688,8.23) 43.688,7.555 C22.2 ; v1(48.082,9.703) 48.082,9.325 C23.2 ; 48.232,24.389 D3.1 ; D2.1 48.305,24.057 v1(48.4,24.152) ; v1(48.514,4.293) 49.047,4.293 U10.2 ; v1(52.138,10.414) 52.407,10.414 C24.2 ; v1(53.467,6.502) 53.721,6.502 U11.2 ; v1(56.312,13.106) 56.363,13.106 C25.2 ; v2(56.525,39.45) 56.575,39.45 57.055,39.93 D1.1 ; v1(58.166,9.576) 58.242,9.576 U12.2 ; v2(64.825,63.025) 64.904,63.025 SW1.4 ; C2.2 65.026,24.636 v1(65.659,24.003) ; SW1.3 70.224,54.226 v2(71.025,53.425) ; C15.2 71.524,51.926 v2(71.6,51.85)
  other v1: 32.639,-1.397 37.719,-1.397 42.799,-1.397 36.748,-1.352 40.894,-1.163 32.233,-1.044 44.779,-0.569 28.2,-0.3 48.75,0.45 24.216,0.884 52.248,1.792 20.456,2.464 55.425,3.35 19.939,3.683 25.019,3.683 17.4,4.121 58.119,4.975 14.733,5.886 60.591,6.756 12.335,7.772 12.319,8.763 17.399,8.763 22.479,8.763 27.559,8.763 32.639,8.763 37.719,8.763 42.799,8.763 63.328,9.119 10.03,9.911 66.04,11.973 8.022,12.097 62.466,13.641 9.779,13.843 19.939,13.843 50.419,13.843 55.499,13.843 65.659,13.843 6.332,14.239 29.947,14.3 31.084,14.3 32.233,14.3 34.722,14.3 35.865,14.3 37.109,14.3 39.472,14.3 33.579,14.326 38.329,14.326 54.253,14.605 68.266,14.838 64.3,15.725 9.825,16.101 69.975,17.45 66.04,18.17 3.714,18.339 8.122,18.339 7.239,18.923 27.559,18.923 42.799,18.923 47.879,18.923 63.119,18.923 68.199,18.923 59.45,19.9 48.627,22.264 61.903,23.763 4.699,24.003 14.859,24.003 19.939,24.003 25.019,24.003 45.339,24.003 50.419,24.003 55.499,24.003 60.579,24.003 0.875,24.847 4.85,24.989 48.514,26.297 63.328,26.972 4.075,28.189 -0.125,28.875 2.159,29.083 7.239,29.083 12.319,29.083 22.479,29.083 27.559,29.083 32.639,29.083 37.719,29.083 42.799,29.083 52.959,29.083 70.831,30.97 3.273,32.159 64.81,32.883 -0.75,33.2 75.15,33.95 4.699,34.163 19.939,34.163 35.179,34.163 40.259,34.163 45.339,34.163 50.419,34.163 55.499,34.163 60.579,34.163 65.659,34.163 70.739,34.163 9.825,35.025 71.325,35.7 65.058,35.869 2.804,36.144 19.025,36.957 17.501,37.033 75.25,37.35 -1.025,37.625 17.93,38.405 2.995,38.999 19.101,39.141 64.956,39.2 2.159,39.243 27.559,39.243 32.639,39.243 37.719,39.243 42.799,39.243 58.039,39.243 63.119,39.243 68.199,39.243 73.279,39.243 71.325,39.314 74.974,40.949 -0.75,41.199 19.101,41.199 3.273,42.134 64.426,42.645 70.831,42.645 19.152,42.875 4.699,44.323 19.939,44.323 30.099,44.323 35.179,44.323 40.259,44.323 45.339,44.323 50.419,44.323 60.579,44.323 65.659,44.323 70.739,44.323 -0.15,44.875 4.075,45.7 0.875,48.625 5.125,49 12.052,49 2.159,49.403 7.239,49.403 37.719,49.403 52.959,49.403 63.119,49.403 68.199,49.403 13.275,51.025 2.275,52.3 59.498,53.425 14.859,54.483 25.019,54.483 30.099,54.483 35.179,54.483 40.259,54.483 50.419,54.483 60.579,54.483 65.659,54.483 20.225,59.075 17.399,59.563 22.479,59.563 52.959,59.563 58.039,59.563 68.199,59.563 51.85,60.431 22.775,60.675 25.436,62.058 48.46,62.223 59.134,63.025 15.392,63.324 29,63.475 45.056,63.475 32.384,64.217 40.975,64.425 63,64.575 14.859,64.643 19.939,64.643 30.099,64.643 40.259,64.643 45.339,64.643 50.419,64.643 55.499,64.643 60.579,64.643 11.675,65.25 55.725,65.475 18.65,65.575 53.001,67.117 60.15,67.117 14.725,67.7 49.625,68.575 56.825,69.35 17.786,69.641 42.799,69.723 47.879,69.723 52.959,69.723 46,69.85 42.025,70.625 52.725,71.5 49.15,72.875 45.225,74.025 29.716,74.168 40.775,74.6 33.9,74.675
NeoPixel: CN1.4 U3.3 | length 41.9
  Top Copper w0.254: U3.3 14.282,13.4 14.663,13.781 14.663,21.588 16.35,23.275 25.425,23.275 26.5,24.35 29.515,27.365 29.515,36.825 27.75,38.59 CN1.4
NetC9_1: C9.1 U1.6 | length 2.4
  Top Copper w0.254: C9.1 25.538,15.502 U1.6@25.85,15.814
NetC9_2: C9.2 L1.2 U1.2 | length 22.1
  Top Copper w0.254: C9.2 26.938,16.081 27.559,16.702 27.559,16.713 27.61,16.764 U1.2@28.6,16.764
  Top Copper w0.508: U1.2@28.6,16.764 29.312,16.764 29.515,16.967 30.505,16.967
  Top Copper w1.27: 30.505,16.967 L1.2@46.126,16.967
NetC10_1: C10.1 C11.1 FB1.2 U2.3
NetCN4_1: CN4.1 Q1.D R3.2 | length 18.9
  Top Copper w0.508: R3.2 61.657,44.982 Q1.D@62.6,45.925
  Top Copper w0.762: Q1.D@56.4,45.925 62.6,45.925 69.658,45.925 CN4.1
NetD1_2: D1.2 R3.1 | length 2
  Top Copper w0.508: D1.2 R3.1
NetD2_2: D2.2 R5.1 | length 2.3
  Top Copper w0.381: R5.1 46.924,23.232 D2.2
NetD3_2: D3.2 R7.1 | length 2.4
  Top Copper w0.508: R7.1 46.848,25.173 D3.2
NetR4_1: R4.1 R6.2 U1.4 | length 3.3
  Top Copper w0.254: R4.1 R6.2 24.29,16.797 25.156,17.663 U1.4
NetU3_1: U3.1 U4.3 | length 11.4
  Top Copper w0.254: U3.1 13.504,12.437 12.827,11.76 12.827,10.439 15.48,7.787 U4.3
NetU4_1: U4.1 U5.3 | length 9.9
  Top Copper w0.254: U4.1 17.78,10.855 v1(18.425,11.5) ; v1(23.2,7.025) 23.2,5.803 U5.3
  Bottom Copper w0.254: v1(18.425,11.5) 18.725,11.5 v1(23.2,7.025)
NetU5_1: U5.1 U6.3 | length 12.2
  Top Copper w0.254: U5.1 22.3,7.651 22.374,7.651 22.374,5.951 22.3,5.877 22.3,4.55 24.65,2.2 28.162,2.2 U6.3
NetU6_1: U6.1 U7.3 | length 9.9
  Top Copper w0.254: U6.1 27.634,6.4 v1(28.5,6.4) ; v1(33.7,4.1) 33.7,3.917 U7.3
  Bottom Copper w0.254: v1(28.5,6.4) 28.525,6.375 31.425,6.375 v1(33.7,4.1)
NetU8_1: U8.1 U9.3 | length 9.6
  Top Copper w0.254: U8.1 38.354,4.354 v1(39.45,5.45) ; v1(45.15,4.975) 46.201,3.924 U9.3
  Bottom Copper w0.254: v1(39.45,5.45) 39.925,4.975 v1(45.15,4.975)
NetU9_1: U9.1 U10.3 | length 11.1
  Top Copper w0.254: U9.1 44.068,4.877 46.075,2.87 49.721,2.87 52.138,5.287 U10.3
NetU10_1: U10.1 U11.3 | length 11.2
  Top Copper w0.254: v1(48.046,7.55) 48.046,7.156 U10.1 ; v1(54.578,9.475) 55.23,8.823 U11.3
  Bottom Copper w0.254: v1(48.046,7.55) 51.499,7.55 53.424,9.475 v1(54.578,9.475)
NetU11_1: U11.1 U12.3 | length 11
  Top Copper w0.254: U11.1 54.528,8.622 55.525,7.625 57.875,7.625 61.07,10.82 U12.3
OLED_SCL: CN1.14 TP1.1 | length 7.7
  Bottom Copper w0.508: CN1.14 54.107,41.13 55.45,42.473 TP1.1
OLED_SDA: CN1.13 TP2.1 | length 8.1
  Bottom Copper w0.508: CN1.13 53.262,38.59 55.525,36.327 TP2.1
PUMP_CTRL: CN1.3 Q1.G R2.1 | length 38.9
  Top Copper w0.508: v2(54.075,49.5) 55.125,49.5 Q1.G 56.425,48.225 R2.1
  Bottom Copper w0.254: CN1.3 35.055,41.13 44.325,50.4 53.175,50.4 v2(54.075,49.5)
SOIL_SEN: CN1.2 CN3.1 | length 21.2
  Top Copper w0.635: CN3.1 13.089,53.711 23.3,43.5 25.43,43.5 CN1.2
TRIG: CN1.6 CN5.2 | length 23.7
  Top Copper w0.254: CN5.2 7.095,26.245 8.075,27.225 19.315,27.225 CN1.6
pads on no net: CN1.1 CN1.9 CN1.12 CN1.15 CN1.16 CN2.0 CN3.0 CN4.0 CN5.0 CN6.0 U12.1

## Polygon pours and split planes (outlines as drawn)
GND on Top Copper "GND_L01_P044" (solid, remove dead copper, pour order 44): 77.025,29.75 77.025,19.458 53.789,-3.646 19.24,-3.646 -2.584,18.178 -3.089,41.667 -3.089,53.462 20.062,76.354 47.566,76.354 53.669,76.354 77.025,52.998
12V on Top Copper "12V_L01_P008" (solid, pour order 8): 29.531,17.78 29.074,17.323 27.61,17.323 27.61,18.161 28.6,19.152 28.626,19.152 28.626,23.419 32.385,27.178 40.767,27.178 40.767,17.78
3.3V on Top Copper "3.3V_L01_P006" (solid, pour order 6): 5.9,44.729 8.796,47.625 16.383,47.625 16.942,47.066 16.942,38.999 15.839,37.897 8.788,37.897 8.788,31.688 10.35,31.688 10.35,31.875 10.9,32.425 10.9,34.95 12.775,34.95 13.05,34.675 13.05,29.425 7.125,29.425 5.9,30.65
12V on Top Copper "12V_L01_P034" (solid, pour order 34): 34.601,54.7 39.447,54.7 39.472,54.725 39.15,55.047 39.15,69.775 34.333,69.775
5V on Top Copper "5V_L01_P026" (solid, pour order 26): 49.632,11.1 49.513,10.981 44.627,10.981 44.627,13.852 44.663,13.887 47.669,13.887 49.695,15.913 51.994,15.913 51.994,11.566 51.528,11.1
5V on Top Copper "5V_L01_P030" (solid, pour order 30): 15.525,28.875 15.525,31.3 15.8,31.575 19.331,31.575 19.331,28.875
NetC10_1 on Top Copper "NETC10_1_L01_P000" (solid, pour order 0): 13.083,34.883 13.183,34.783 13.183,31.648 19.126,31.648 19.736,32.258 19.736,34.937 19.037,35.636 15.367,35.636
3.3V on Power "3.3V_L03_P032" (solid, pour order 32): 76.957,30.332 76.957,20.04 53.721,-3.064 19.172,-3.064 -2.652,18.76 -3.157,42.249 -3.157,54.044 19.994,76.936 47.498,76.936 53.601,76.936 76.957,53.581
5V on Power "5V_L03_P020" (solid, pour order 20): 15.773,25.654 15.773,25.655 15.773,31.837 19.138,31.837 19.35,31.625 19.35,25.654 43.866,25.654 58.445,25.654 70.053,14.046 70.383,14.046 70.383,13.183 63.83,6.629 63.779,6.629 53.823,-3.327 20.269,-3.327 8.661,8.28 4.284,14.164
12V on Power "12V_L03_P018" (solid, pour order 18): 34.325,56.925 39.425,56.925 39.425,25.025 34.748,25.025
5V on Power "5V_L03_P022" (solid, pour order 22): 12.294,-7.493
GND on GND "GND_L02_P002" (solid, pour order 2): 77.216,29.972 77.216,19.68 53.98,-3.424 19.431,-3.424 -2.393,18.4 -2.898,41.889 -2.898,53.684 20.253,76.576 47.757,76.576 53.86,76.576 77.216,53.22
GND on Bottom Copper "GND_L04_P004" (solid, pour order 4): 77.084,30.155 77.084,19.863 53.848,-3.241 19.299,-3.241 -2.525,18.583 -3.03,42.071 -3.03,53.867 20.121,76.759 47.625,76.759 53.728,76.759 77.084,53.403

## Silkscreen, mask and mechanical layers (free items; w line width, h text height)
Top Overlay:
  text "ESP-Grow Rev A / Kyle R. Designs" at 26.289,57.429 h1.52
  text "PUMP" at 57.069,38.125 h0.76
  text "3.3V" at 50.125,24.625 h1.27
  text "5V" at 50.375,22.35 h1.27
Mechanical 1:
  drawing of 297 lines, arcs and shapes, not listed
  text "Layer" at -13.525,121.094 h1.52
  text "Name" at -3.114,121.094 h1.52
  text "Material" at 20.502,121.094 h1.52
  text "Thickness" at 42.34,121.094 h1.52
  text "Constant" at 58.846,121.094 h1.52
  text "Board Layer Stack" at 73.32,121.094 h1.52
  text "1" at -13.525,118.046 h1.52
  text "Top Overlay" at -3.114,118.046 h1.52
  text "2" at -13.525,114.998 h1.52
  text "Top Mask" at -3.114,114.998 h1.52
  text "Solder Resist" at 20.502,114.998 h1.52
  text "0.59mil" at 42.34,114.998 h1.52
  text "3.8" at 58.846,114.998 h1.52
  text "3" at -13.525,111.95 h1.52
  text "Top Copper" at -3.114,111.95 h1.52
  text "Copper" at 20.502,111.95 h1.52
  text "1.38mil" at 42.34,111.95 h1.52
  text "4" at -13.525,108.902 h1.52
  text "Dielectric 1" at -3.114,108.902 h1.52
  text "2313" at 20.502,108.902 h1.52
  text "3.94mil" at 42.34,108.902 h1.52
  text "4.05" at 58.846,108.902 h1.52
  text "5" at -13.525,105.855 h1.52
  text "GND" at -3.114,105.855 h1.52
  text "Copper" at 20.502,105.855 h1.52
  text "0.69mil" at 42.34,105.855 h1.52
  text "6" at -13.525,102.806 h1.52
  text "Core" at -3.114,102.806 h1.52
  text "FR-4" at 20.502,102.806 h1.52
  text "49.80mil" at 42.34,102.806 h1.52
  text "4.5" at 58.846,102.806 h1.52
  text "7" at -13.525,99.758 h1.52
  text "Power" at -3.114,99.758 h1.52
  text "Copper" at 20.502,99.758 h1.52
  text "0.69mil" at 42.34,99.758 h1.52
  text "8" at -13.525,96.71 h1.52
  text "Dielectric 2" at -3.114,96.71 h1.52
  text "2313" at 20.502,96.71 h1.52
  text "3.94mil" at 42.34,96.71 h1.52
  text "4.05" at 58.846,96.71 h1.52
  text "9" at -13.525,93.662 h1.52
  text "Bottom Copper" at -3.114,93.662 h1.52
  text "Copper" at 20.502,93.662 h1.52